# Allegro board expansionboard.brd
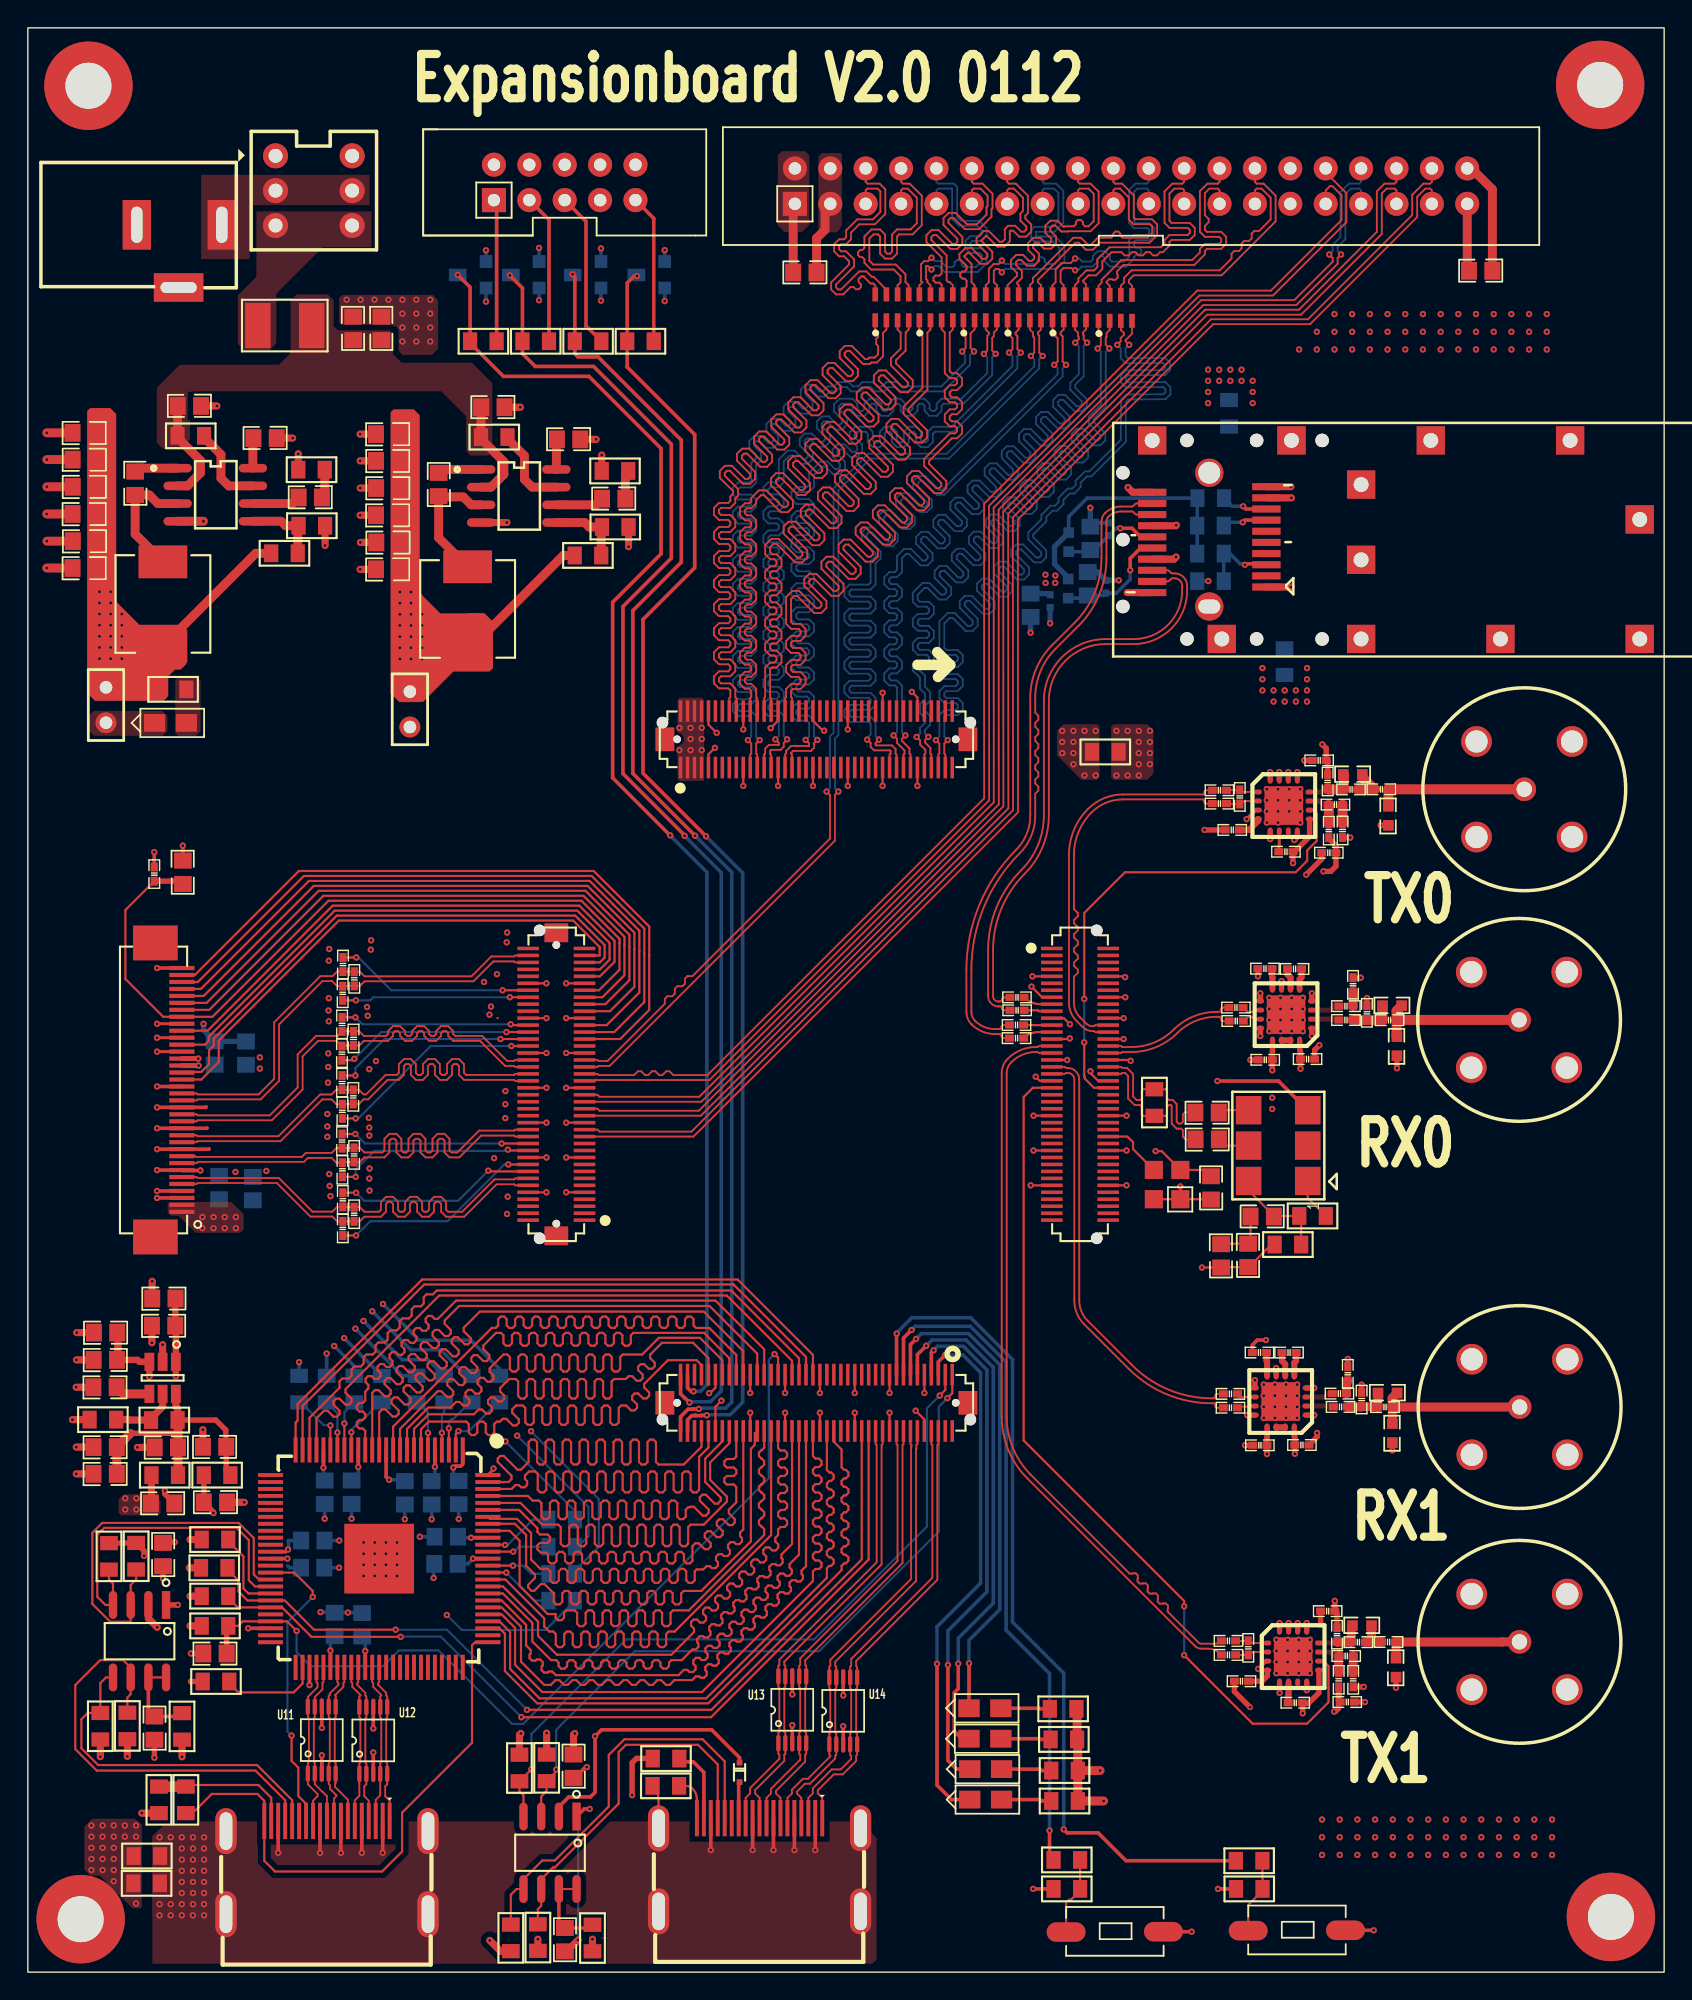
[diagram p0: board, top side]
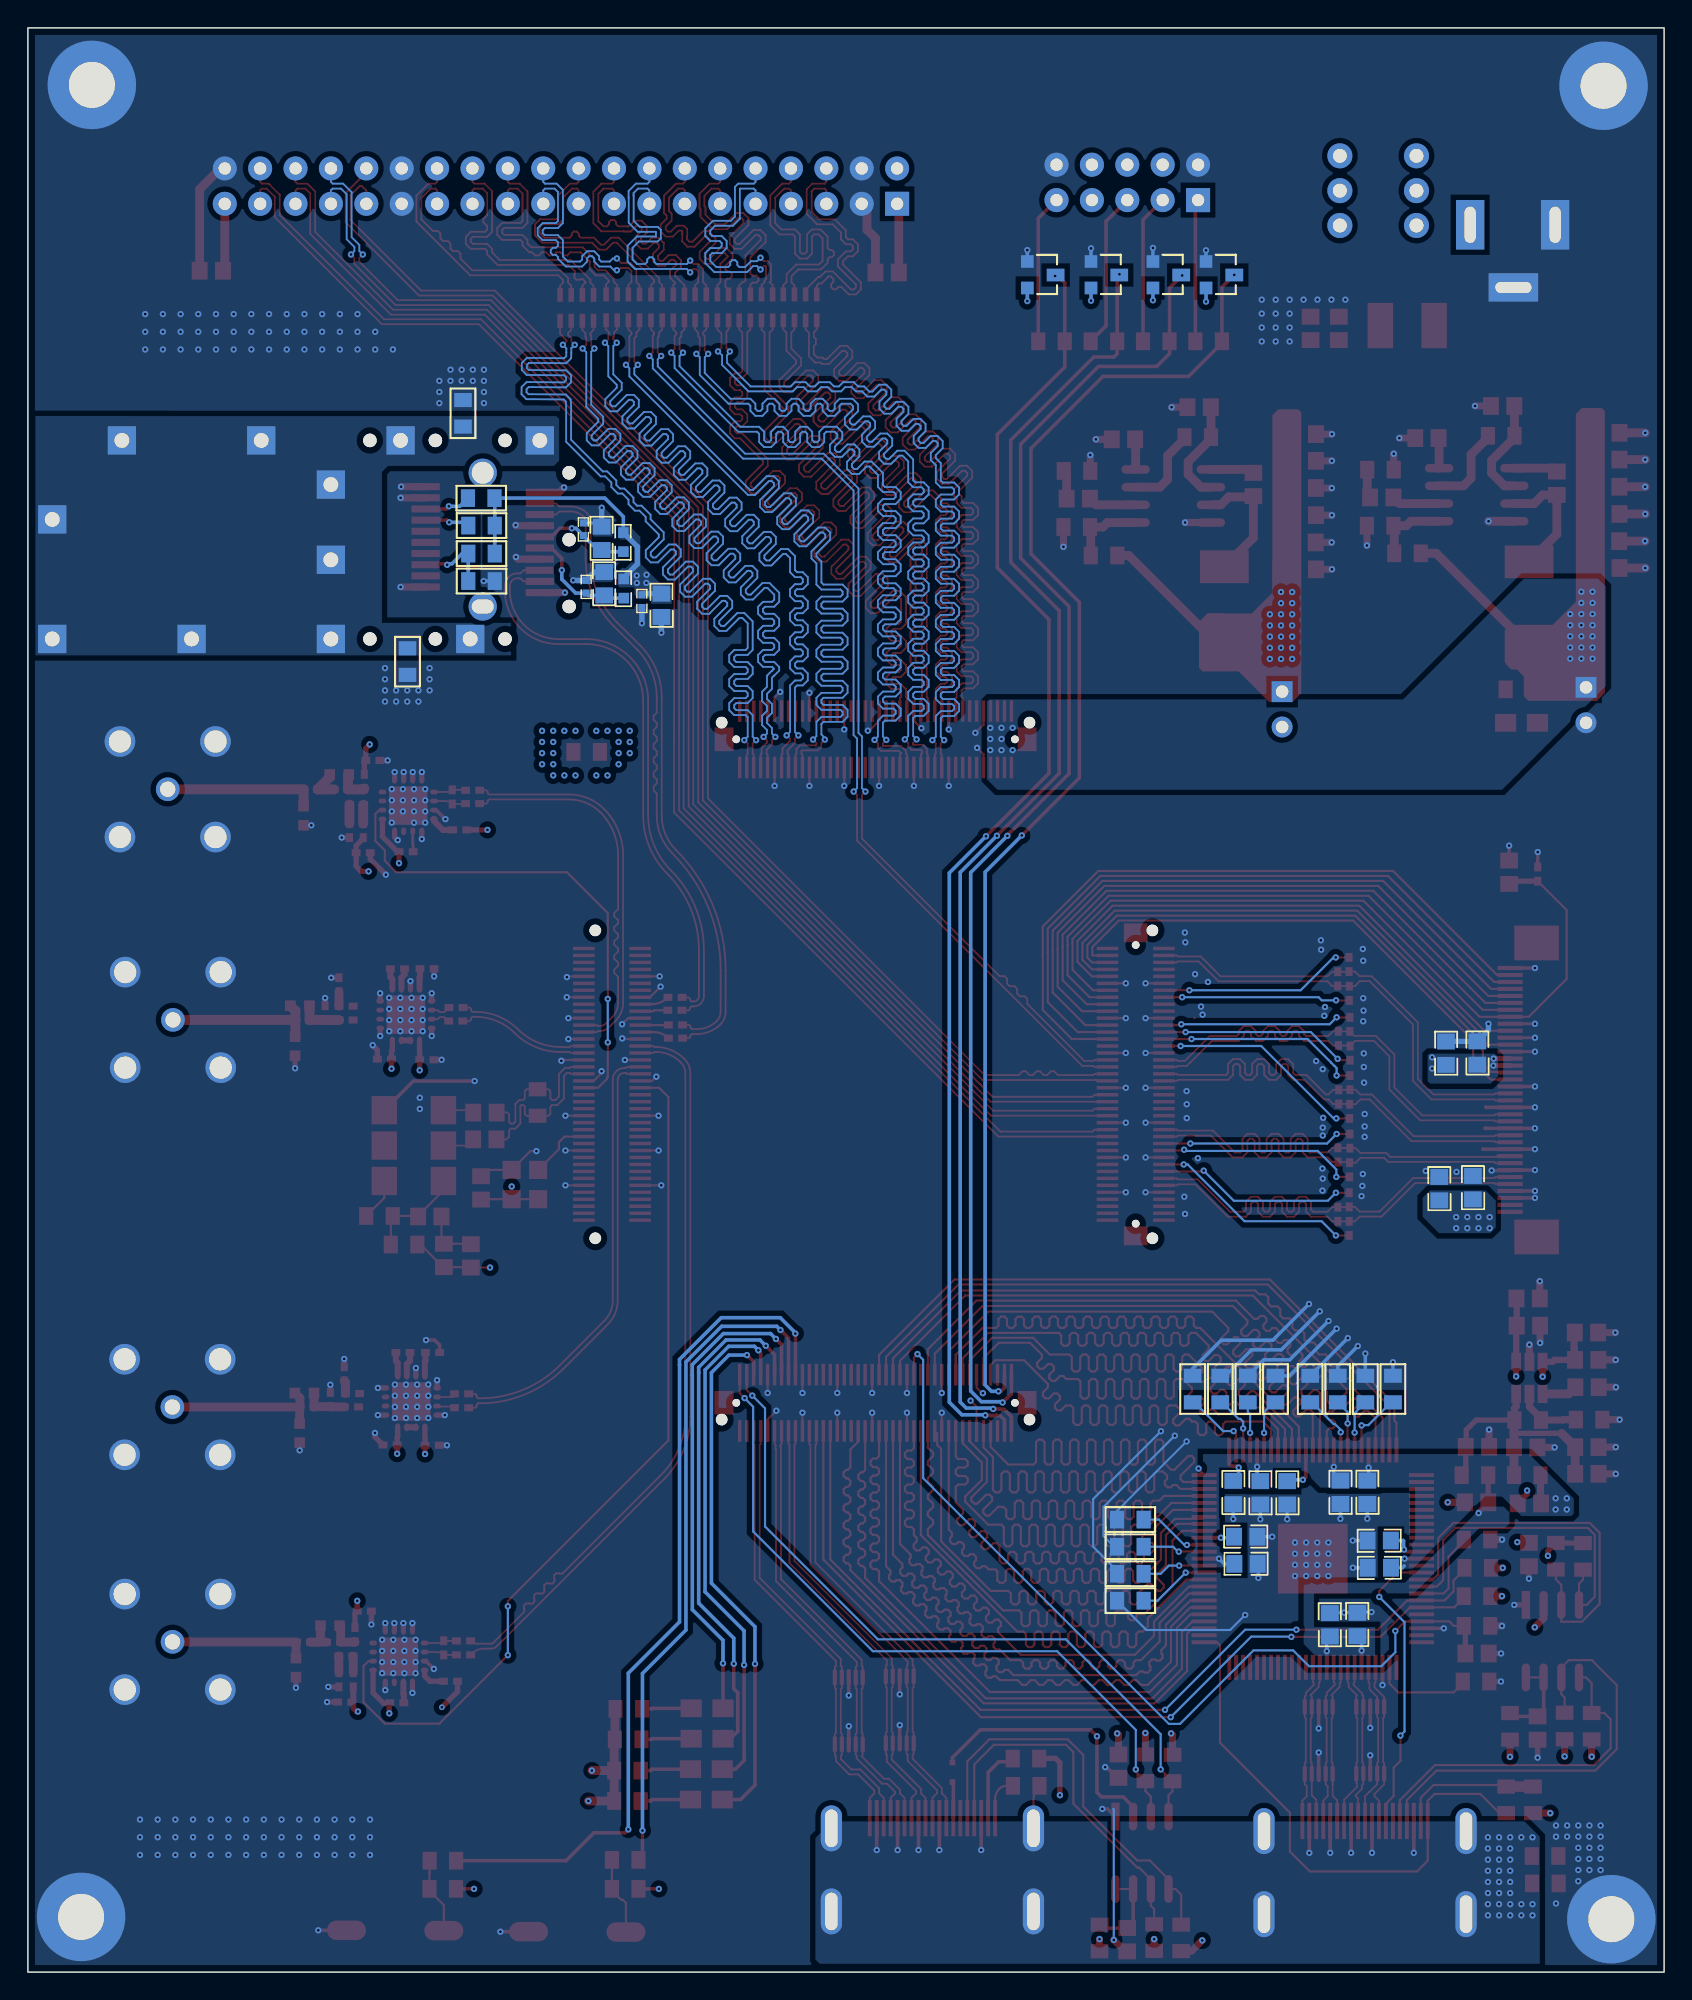
[diagram p1: board, bottom side, seen from below]

Outline 117.45 x 139.55 mm; copper layers: TOP, GND02, PWR03, BOTTOM. Coordinates in mm from the lower left corner of the outline.
Outline path: rectangle 0,0 117.45,139.55

## Design rules (mm)
net group DIFFPAIR36: nets B34_L24_N B34_L24_P
net group MG_HDMI: nets HDMI_CLKN HDMI_CLKP HDMI_D0N HDMI_D0P HDMI_D1N HDMI_D1P HDMI_D2N HDMI_D2P
net group MG_IO2: nets IO_6N IO_6P IO_7N IO_7P IO_8N IO_8P IO_9N IO_9P IO_10N IO_10P IO_11N IO_11P IO_13N IO_13P IO_14N IO_14P IO_15N IO_15P IO_16N IO_16P IO_17N IO_17P
net group MG_MGT_IO: nets MGT_RX2_N MGT_RX2_P MGT_TX2_N MGT_TX2_P
net group MG_SII9136_IN: nets SII9136_B0 SII9136_B1 SII9136_B2 SII9136_B3 SII9136_B4 SII9136_B5 SII9136_B6 SII9136_B7 SII9136_CLK SII9136_G0 SII9136_G1 SII9136_G2 SII9136_G3 SII9136_G4 SII9136_G5 SII9136_G6 SII9136_G7 SII9136_HSYNC SII9136_R0 SII9136_R1 SII9136_R2 SII9136_R3 SII9136_R4 SII9136_R5 SII9136_R6 SII9136_R7 SII9136_SYNC

## Placement (name value [footprint] x y rotation side)
C1  0.1uf  [C0805]  88.6 54.23 0 top
C2  0.1uf  [C0805]  85.65 51.41 90 top
C3  4.7uf  [C0805]  87.59 51.44 90 top
C4  0.1uf  [C0805]  84.65 59.77 180 top
C5  0.1uf  [C0805]  84.64 61.69 180 top
C9  1uf  [R0402]  90.92 72 180 top
C10  0.1uf  [R0402]  88.82 65.48 180 top
C11  0.1uf  [R0402]  91.86 65.53 0 top
C12  4.7uf  [R0402]  86.72 69.23 180 top
C13  4.7uf  [R0402]  86.74 68.27 180 top
C14  10nf  [R0402]  88.8 72.02 180 top
C15  4.7uf  [R0402]  94.61 68.34 180 top
C16  4.7uf  [R0402]  94.61 69.33 180 top
C17  0.1uf  [R0402]  92.69 86.97 180 top
C18  4.7uf  [R0402]  93.86 83.8 180 top
C19  4.7uf  [R0402]  97.15 84.9 180 top
C20  4.7uf  [R0402]  85.53 83.87 180 top
C21  4.7uf  [R0402]  85.53 84.83 180 top
C22  0.1uf  [R0402]  93.38 80.35 180 top
C23  1uf  [R0402]  90.53 44.47 180 top
C24  0.1uf  [R0402]  91.45 37.84 0 top
C25  0.1uf  [R0402]  88.43 37.82 180 top
C26  4.7uf  [R0402]  86.32 41.5 180 top
C27  4.7uf  [R0402]  86.32 40.51 180 top
C28  10nf  [R0402]  88.4 44.47 180 top
C29  4.7uf  [R0402]  94.22 40.57 180 top
C30  4.7uf  [R0402]  94.14 41.52 180 top
C31  0.1uf  [R0402]  93.3 25.91 180 top
C32  4.7uf  [R0402]  94.63 22.69 180 top
C33  4.7uf  [R0402]  97.67 23.69 180 top
C34  4.7uf  [R0402]  86.18 22.77 180 top
C35  4.7uf  [R0402]  86.18 23.77 180 top
C36  0.1uf  [R0402]  94.71 19.39 0 top
C37  10uf  [C0805]  9.74 46.4 180 top
C38  100nf  [C0805]  9.76 48.35 180 top
C39  22nf  [C0805]  5.54 41.98 180 top
C40  10uf  [C0805]  5.55 37.68 180 top
C41  100nf  [C0805]  5.55 35.76 180 top
C42  0.1uf  [C0805]  9.7 29.97 270 top
C43  0.1uf  [C0805]  9.08 17.52 270 top
C44  1nf  [C0805]  13.43 22.87 180 top
C45  10uf  [C0805]  9.94 37.66 180 top
C46  0.1uf  [C0805]  9.67 33.64 0 top
C47  0.1uf  [C0805]  20.44 29.03 0 bottom
C48  0.1uf  [C0805]  30.01 29.3 180 bottom
C49  0.1uf  [C0805]  28.99 34.4 270 bottom
C50  0.1uf  [C0805]  23.24 34.44 270 bottom
C51  0.1uf  [C0805]  21.31 34.44 270 bottom
C52  10uf  [C0805]  13.4 37.7 180 top
C53  0.1uf  [C0805]  13.46 33.72 0 top
C54  0.1uf  [C0805]  22.02 24.95 90 bottom
C55  0.1uf  [C0805]  23.99 24.93 90 bottom
C56  10uf  [C0805]  5.58 45.9 180 top
C57  0.1uf  [C0805]  5.56 43.94 180 top
C58  0.1uf  [C0805]  30.03 31.25 180 bottom
C59  0.1uf  [C0805]  27.06 34.4 270 bottom
C60  0.1uf  [C0805]  30.93 34.42 270 bottom
C61  0.1uf  [C0805]  20.45 30.98 0 bottom
C62  100nf/10V  [C0805]  13.73 56.31 270 bottom
C63  47uf/10V  [C0805]  16.14 56.24 270 bottom
C64  22uf/10V  [C0805]  15.66 65.96 270 bottom
C65  100nf/10V  [C0805]  13.41 65.97 270 bottom
C66  22pf  [C0805]  11.13 78.94 90 top
C67  10uf  [C0805]  11.59 112.41 0 top
C68  0.01uf  [C0805]  7.7 106.86 270 top
C69  0.1uf  [C0805]  17.03 110.1 0 top
C70  33nf  [C0805]  20.27 105.85 0 top
C71  10uf  [C0805]  4.05 108.56 180 top
C72  10uf  [C0805]  4.05 106.61 180 top
C73  0.1uf  [C0805]  4.04 110.48 180 top
C74  0.1uf  [C0805]  4.06 102.71 180 top
C75  0.1uf  [C0805]  4.04 100.78 180 top
C76  0.1uf  [C0805]  4.04 104.66 180 top
C77  10uf  [C0805]  33.38 112.32 0 top
C78  0.01uf  [C0805]  29.48 106.77 270 top
C79  0.1uf  [C0805]  38.81 110.01 0 top
C80  33nf  [C0805]  42.05 105.76 0 top
C81  10uf  [C0805]  25.83 108.47 180 top
C82  10uf  [C0805]  25.84 106.52 180 top
C83  0.1uf  [C0805]  25.83 104.57 180 top
C84  0.1uf  [C0805]  25.85 102.62 180 top
C85  0.1uf  [C0805]  25.83 100.69 180 top
C86  0.1uf  [C0805]  25.83 110.39 180 top
C87  10uf  [C0805]  25.38 117.98 90 top
C88  0.1uf  [C0805]  23.35 117.98 90 top
C89  0.1uf  [C0805]  104.28 122.11 0 top
C90  0.1uf  [C0805]  55.77 121.99 0 top
C91  0.1uf  [C0805]  39.17 14.78 270 top
C92  0.1uf  [C0805]  38.55 2.33 270 top
C93  0.1uf  [C0805]  84.92 56.29 270 top
C94  0.1uF  [C0402]  77.38 99.44 90 bottom
C95  10uf  [C0805]  76.08 99.65 90 bottom
C96  0.1uF  [C0402]  77.58 103.56 90 bottom
C97  10uf  [C0805]  76.26 102.91 90 bottom
C98  0.1uF  [C0402]  73.38 98.4 270 bottom
C99  22uF  [C0805]  71.97 98.1 270 bottom
C100  0.1uf  [R0402]  71 69.96 0 top
C101  0.1uf  [R0402]  71.01 69.04 0 top
C102  0.1uf  [R0402]  70.97 67.98 0 top
C103  0.1uf  [R0402]  70.97 67.04 0 top
CN5  Camera  [FPC36-0R5-23R6X5R75]  11.05 63.32 90 top
CON1  CON40X2_0  [1000K-F80E-01L-A]  56.6 88.48 0 top
CON2  CON40X2_0  [1000K-F80E-01L-A]  37.93 63.72 90 top
CON3  CON40X2_0  [1000K-F80E-01L-A]  56.6 40.86 180 top
CON4  CON40X2_0  [1000K-F80E-01L-A-TEMP]  75.52 63.72 270 top
D1  PGB1010603  [D0603]  98.27 66.46 270 top
D2  PGB1010603  [D0603]  97.66 83 270 top
D3  PGB1010603  [D0603]  97.94 38.69 270 top
D4  PGB1010603  [D0603]  98.21 21.85 270 top
D5  LED  [LEDSO]  9.09 89.66 0 top
D6  BAT54S  [SOT23]  32.88 122.78 270 bottom
D7  BAT54S  [SOT23]  36.69 122.78 270 bottom
D8  BAT54S  [SOT23]  41.14 122.78 270 bottom
D9  BAT54S  [SOT23]  45.71 122.78 270 bottom
D10  LED  [LEDSO]  67.55 18.94 0 top
D11  LED  [LEDSO]  67.55 16.75 0 top
D12  LED  [LEDSO]  67.6 14.57 0 top
D13  LED  [LEDSO]  67.6 12.39 0 top
D14  -  [BAS16XV2T1G]  51.08 14.34 270 top
F1  FUSE  [FUSE_1812]  18.44 118.18 180 top
G1  OSC_7050  [OSC6-5X7]  91.87 56.78 90 top
HOLE1  HOLE  [FPAD_1]  113.63 3.96 0 top
HOLE2  HOLE  [FPAD_1]  4.35 135.39 0 top
HOLE3  HOLE  [FPAD_1]  112.86 135.45 0 top
HOLE4  HOLE  [FPAD_1]  3.79 3.8 0 top
J1  BNC  [SDI5]  107.04 68.35 90 top
J2  BNC  [SDI5]  107.41 84.9 180 top
J3  BNC  [SDI5]  107.08 40.56 90 top
J4  BNC  [SDI5]  107.07 23.71 180 top
J5  WBC1X19S4M2  [MINI_HDMI]  25.97 10.85 0 top
J6  FPGABoardInterface  [IDC-40J]  79.19 128.19 0 top
J7  HEADER 5X2  [JTAG-10]  33.45 127.19 0 top
J8  CON2  [HDR1X2]  5.61 92.21 270 top
J9  CON2  [HDR1X2]  27.42 91.91 270 top
J10  WBC1X19S4M2  [MINI_HDMI]  57.02 11.05 0 top
J11  SFP & CONN  [SD-74737-0033]  88.9 99.42 180 top
L1  5.6nH  [L0603]  97.92 69.36 180 top
L2  5.6nH  [L0603]  95.1 85.96 180 top
L3  5.6nH  [L0603]  97.6 41.56 180 top
L4  5.6nH  [L0603]  95.76 24.87 180 top
L5  INDUCTOR  [R0805]  8.54 8.33 180 top
L6  600Ohm_100Mhz  [R0805]  9.82 35.67 180 top
L7  600Ohm_100Mhz  [R0805]  13.58 35.67 180 top
L8  10uh  [SMTDR75-100M]  9.69 98.2 270 top
L9  10uh  [SMTDR75-100M]  31.57 97.84 270 top
L10  600Ohm 100Mhz  [R0805]  90.44 52.22 180 top
L11  INDUCTOR  [R0805]  8.52 6.37 180 top
L12  MPZ1608 220OHM 100Mhz  [L0603]  74.68 99.3 270 bottom
L13  MPZ1608 220OHM 100Mhz  [L0603]  74.71 102.64 270 bottom
R1  75R  [R0402]  97.74 68.33 180 top
R2  75R  [R0402]  96.11 68.85 90 top
R3  37.4R  [R0402]  95.12 70.87 90 top
R4  75R  [R0402]  93.3 85.46 270 top
R5  75R  [R0402]  93.38 81.93 90 top
R6  10k  [R0402]  90.3 80.42 180 top
R7  750R  [R0402]  86.45 81.98 0 top
R8  75R  [R0402]  94.37 81.94 270 top
R9  0R  [R0805]  77.34 87.58 0 top
R10  75R  [R0402]  94.98 84.89 180 top
R11  75R  [R0402]  97.41 40.56 180 top
R12  75R  [R0402]  95.74 41.1 90 top
R13  37.4R  [R0402]  94.74 42.95 90 top
R14  75R  [R0402]  93.97 24.22 270 top
R15  75R  [R0402]  94.09 20.98 90 top
R16  10k  [R0402]  90.97 19.33 180 top
R17  750R  [R0402]  87.11 20.88 0 top
R18  75R  [R0402]  95.13 20.98 270 top
R19  75R  [R0402]  95.5 23.68 180 top
R24  4.7K  [R0805]  11.34 12.36 270 top
R25  0  [R0805]  9.41 12.36 270 top
R26  10k  [R0805]  9.79 39.62 180 top
R27  20k  [R0805]  5.38 39.65 180 top
R28  4.7K  [R0805]  7.77 29.85 270 top
R29  4.7K  [R0805]  5.82 29.84 270 top
R30  200k  [R0805]  11.06 17.64 90 top
R31  1.5k  [R0805]  7.14 17.67 90 top
R32  1.5k  [R0805]  5.2 17.65 90 top
R33  4.7K  [R0805]  33.84 41.85 90 bottom
R34  4.7K  [R0805]  31.86 41.85 90 bottom
R35  4.7K  [R0805]  29.88 41.85 90 bottom
R36  4.7K  [R0805]  27.9 41.85 90 bottom
R37  4.7K  [R0805]  25.41 41.85 90 bottom
R38  4.7K  [R0805]  23.43 41.85 90 bottom
R39  4.7K  [R0805]  21.45 41.85 90 bottom
R40  4.7K  [R0805]  19.47 41.85 90 bottom
R41  4.7K  [R0805]  38.31 30.53 180 bottom
R42  4.7K  [R0805]  38.31 32.48 180 bottom
R43  4.7K  [R0805]  38.31 28.59 180 bottom
R44  4.7K  [R0805]  38.31 26.66 180 bottom
R45  4.02k  [R0805]  13.5 20.86 180 top
R46  4.7K  [R0805]  13.43 31.05 180 top
R47  4.7K  [R0805]  13.43 24.85 180 top
R48  4.7K  [R0805]  13.38 29.02 0 top
R49  4.7K  [R0805]  13.43 26.98 0 top
R50  100R  [R0402]  22.61 53.38 270 top
R51  150R  [R0402]  23.42 54.4 270 top
R52  100R  [R0402]  22.61 55.43 90 top
R53  100R  [R0402]  22.58 57.59 270 top
R54  150R  [R0402]  23.42 58.65 90 top
R55  100R  [R0402]  22.56 59.65 90 top
R56  10k  [R0402]  9.07 78.81 90 top
R57  100R  [R0402]  22.58 61.78 270 top
R58  150R  [R0402]  23.36 62.82 90 top
R59  100R  [R0402]  22.56 63.85 90 top
R60  100R  [R0402]  22.55 65.96 270 top
R61  150R  [R0402]  23.38 67.02 90 top
R62  100R  [R0402]  22.56 68.02 90 top
R63  100R  [R0402]  22.6 70.26 270 top
R64  150R  [R0402]  23.43 71.29 90 top
R65  100R  [R0402]  22.62 72.32 90 top
R66  47k  [R0805]  11.69 110.27 0 top
R67  2.2k  [R0805]  20.36 107.84 0 top
R68  10k/1%  [R0805]  20.38 103.81 0 top
R69  44.2k/1%  [R0805]  18.42 101.83 180 top
R70  47k  [R0805]  33.48 110.18 0 top
R71  2.2k  [R0805]  42.14 107.75 0 top
R72  10k/1%  [R0805]  42.16 103.72 0 top
R73  26.1k/1%  [R0805]  40.2 101.68 180 top
R74  5k  [R0805]  10.42 92.07 0 top
R75  33R  [R0805]  32.69 117.05 0 top
R76  33R  [R0805]  36.45 117.05 0 top
R77  33R  [R0805]  40.21 117.05 0 top
R78  33R  [R0805]  43.97 117.05 0 top
R79  1k  [R0805]  74.31 18.9 180 top
R80  1k  [R0805]  74.36 16.7 180 top
R81  1k  [R0805]  74.41 14.47 180 top
R82  1k  [R0805]  74.41 12.28 180 top
R83  1k  [R0805]  74.57 8.06 0 top
R84  10k  [R0805]  74.57 5.97 0 top
R85  1k  [R0805]  87.66 8 0 top
R86  10k  [R0805]  87.67 5.97 0 top
R87  100R/NC  [R0402]  87.6 23.28 90 top
R88  100R/NC  [R0402]  86.99 84.35 90 top
R89  4.7K  [R0805]  92.21 54.27 180 top
R90  100R  [R0805]  80.86 62.41 90 top
R91  4.7K  [R0805]  45.79 13.37 180 top
R92  0  [R0805]  45.81 15.33 180 top
R93  4.7K  [R0805]  37.24 14.66 270 top
R94  4.7K  [R0805]  35.29 14.65 270 top
R95  200k  [R0805]  40.53 2.45 90 top
R96  1.5k  [R0805]  36.61 2.48 90 top
R97  1.5k  [R0805]  34.67 2.46 90 top
R98  0R  [R0805]  86.22 111.88 270 bottom
R99  0R  [R0805]  90.2 94.06 270 bottom
R100  4.7K  [R0805]  84.89 101.81 180 bottom
R101  4.7K  [R0805]  84.91 105.8 180 bottom
R102  NC  [R0805]  84.89 99.84 0 bottom
R103  4.7K  [R0805]  84.89 103.83 0 bottom
RN1  RESARR_IS_4/SM  [RN-8P]  60.83 118.56 90 top
RN2  RESARR_IS_4/SM  [RN-8P]  63.99 118.56 90 top
RN3  RESARR_IS_4/SM  [RN-8P]  67.16 118.56 90 top
RN4  RESARR_IS_4/SM  [RN-8P]  70.32 118.56 90 top
RN5  RESARR_IS_4/SM  [RN-8P]  73.55 118.56 90 top
RN6  RESARR_IS_4/SM  [RN-8P]  76.85 118.52 90 top
SW2  Button  [KEY735SO]  74.52 2.88 0 top
SW3  Button  [KEY735SO]  87.59 2.98 0 top
SW4  Switch  [POWER_SW]  23.28 127.86 0 top
U1  GV8601A  [QFP16-0R65-4X4]  90.31 68.72 90 top
U2  GV8500  [QFP16-0R65-4X4]  90.15 83.73 270 top
U3  GV8601A  [QFP16-0R65-4X4]  89.93 40.95 90 top
U4  GV8500  [QFP16-0R65-4X4]  90.82 22.65 270 top
U5  RT9065  [SOT23-6]  9.67 42.65 180 top
U6  GTL2002D  [SO8-1R27-4]  8.02 23.75 180 top
U7  SII9136_3  [TQFP100-0R5-16X16]  25.22 29.68 270 top
U8  MP1482DS  [MP1482-SOIC8]  13.45 106.04 270 top
U9  MP1482DS  [MP1482-SOIC8]  35.23 105.95 270 top
U10  DCJACK  [CN1-DCJACK]  7.82 125.42 270 top
U11  AZ1045-04F  [MSOP10]  20.1 14.25 90 top
U12  AZ1045-04F  [MSOP10]  23.79 14.23 90 top
U13  AZ1045-04F  [MSOP10]  53.87 16.43 90 top
U14  AZ1045-04F  [MSOP10]  57.53 16.35 90 top
U15  GTL2002D  [SO8-1R27-4]  37.48 8.56 180 top
Y1  27Mhz  [OSC3_2X2_5]  82.72 55.48 180 top

## Library data of the parts
C1-C5 C9-C103 = CAP
CN5 = Camera
CON1-CON4 = CON40X2_0
D1-D4 = ESD_0
D5 D10-D13 = LED
D6-D9 = BAT54S
D14 = BAS16XV2T1G
F1 = FUSE
G1 = SiT9102
HOLE1-HOLE4 = HOLE
J1-J4 = SDIInterface
J5 J10 = HDMI
J6 = FPGABoardInterface
J7 = HEADER 5X2
J8 J9 = CON2
J11 = SFP_AND_CONN
L1-L11 = INDUCTOR
L12 L13 = MPZ1608 220OHM 100Mhz
R1-R19 R24-R103 = RESISTOR
RN1-RN6 = RESARR_IS_4/SM
SW2 SW3 = Button
SW4 = Switch_0
U1 U3 = GV8601A_0
U2 U4 = GV8500_0
U5 = RT9065
U6 U15 = GTL2002D
U7 = SII9136_3
U8 U9 = MP1482DS
U10 = DCJACK
U11-U14 = RCLAMP0504M
Y1 = 27Mhz

## Footprints (pads in the part's own frame, mm; a bottom-side part is the same pattern mirrored in y, then rotated)
1000K-F80E-01L-A
  round 0.8 hole 0.8 unplated: (-11.049,1.206) (11.049,1.206)
  round 0.551 hole 0.551 unplated: (-10,0) (10,0)
  rect 0.249x1.549 smd: 1(-9.751,-2.024) 2(-9.751,2.024) 3(-9.251,-2.024) 4(-9.251,2.024) 5(-8.75,-2.024) 6(-8.75,2.024) 7(-8.25,-2.024) 8(-8.25,2.024) 9(-7.75,-2.024) 10(-7.75,2.024) 11(-7.249,-2.024) 12(-7.249,2.024) 13(-6.751,-2.024) 14(-6.751,2.024) 15(-6.251,-2.024) 16(-6.251,2.024) 17(-5.751,-2.024) 18(-5.751,2.024) 19(-5.25,-2.024) 20(-5.25,2.024) 21(-4.75,-2.024) 22(-4.75,2.024) 23(-4.249,-2.024) 24(-4.249,2.024) 25(-3.749,-2.024) 26(-3.749,2.024) 27(-3.251,-2.024) 28(-3.251,2.024) 29(-2.751,-2.024) 30(-2.751,2.024) 31(-2.25,-2.024) 32(-2.25,2.024) 33(-1.75,-2.024) 34(-1.75,2.024) 35(-1.25,-2.024) 36(-1.25,2.024) 37(-0.749,-2.024) 38(-0.749,2.024) 39(-0.249,-2.024) 40(-0.249,2.024) 41(0.249,-2.024) 42(0.249,2.024) 43(0.749,-2.024) 44(0.749,2.024) 45(1.25,-2.024) 46(1.25,2.024) 47(1.75,-2.024) 48(1.75,2.024) 49(2.25,-2.024) 50(2.25,2.024) 51(2.751,-2.024) 52(2.751,2.024) 53(3.251,-2.024) 54(3.251,2.024) 55(3.749,-2.024) 56(3.749,2.024) 57(4.249,-2.024) 58(4.249,2.024) 59(4.75,-2.024) 60(4.75,2.024) 61(5.25,-2.024) 62(5.25,2.024) 63(5.751,-2.024) 64(5.751,2.024) 65(6.251,-2.024) 66(6.251,2.024) 67(6.751,-2.024) 68(6.751,2.024) 69(7.249,-2.024) 70(7.249,2.024) 71(7.75,-2.024) 72(7.75,2.024) 73(8.25,-2.024) 74(8.25,2.024) 75(8.75,-2.024) 76(8.75,2.024) 77(9.251,-2.024) 78(9.251,2.024) 79(9.751,-2.024) 80(9.751,2.024)
  rect 1.351x1.699 smd: 81(-10.876,0) 84(10.876,0)
1000K-F80E-01L-A-TEMP
  round 0.8 hole 0.8 unplated: (-11.049,1.206) (11.049,1.206)
  rect 0.249x1.549 smd: 1(-9.751,-2.024) 2(-9.751,2.024) 3(-9.251,-2.024) 4(-9.251,2.024) 5(-8.75,-2.024) 6(-8.75,2.024) 7(-8.25,-2.024) 8(-8.25,2.024) 9(-7.75,-2.024) 10(-7.75,2.024) 11(-7.249,-2.024) 12(-7.249,2.024) 13(-6.751,-2.024) 14(-6.751,2.024) 15(-6.251,-2.024) 16(-6.251,2.024) 17(-5.751,-2.024) 18(-5.751,2.024) 19(-5.25,-2.024) 20(-5.25,2.024) 21(-4.75,-2.024) 22(-4.75,2.024) 23(-4.249,-2.024) 24(-4.249,2.024) 25(-3.749,-2.024) 26(-3.749,2.024) 27(-3.251,-2.024) 28(-3.251,2.024) 29(-2.751,-2.024) 30(-2.751,2.024) 31(-2.25,-2.024) 32(-2.25,2.024) 33(-1.75,-2.024) 34(-1.75,2.024) 35(-1.25,-2.024) 36(-1.25,2.024) 37(-0.749,-2.024) 38(-0.749,2.024) 39(-0.249,-2.024) 40(-0.249,2.024) 41(0.249,-2.024) 42(0.249,2.024) 43(0.749,-2.024) 44(0.749,2.024) 45(1.25,-2.024) 46(1.25,2.024) 47(1.75,-2.024) 48(1.75,2.024) 49(2.25,-2.024) 50(2.25,2.024) 51(2.751,-2.024) 52(2.751,2.024) 53(3.251,-2.024) 54(3.251,2.024) 55(3.749,-2.024) 56(3.749,2.024) 57(4.249,-2.024) 58(4.249,2.024) 59(4.75,-2.024) 60(4.75,2.024) 61(5.25,-2.024) 62(5.25,2.024) 63(5.751,-2.024) 64(5.751,2.024) 65(6.251,-2.024) 66(6.251,2.024) 67(6.751,-2.024) 68(6.751,2.024) 69(7.249,-2.024) 70(7.249,2.024) 71(7.75,-2.024) 72(7.75,2.024) 73(8.25,-2.024) 74(8.25,2.024) 75(8.75,-2.024) 76(8.75,2.024) 77(9.251,-2.024) 78(9.251,2.024) 79(9.751,-2.024) 80(9.751,2.024)
BAS16XV2T1G
  rect 0.406x0.406 smd: 1(-0.701,0) 2(0.701,0)
C0402
  rect 0.508x0.508 smd: 1(-0.457,0) 2(0.457,0)
C0805
  rect 1.143x1.27 smd: 1(-0.838,0) 2(0.838,0)
CN1-DCJACK
  rect 3.556x2.032 hole 2.601x0.8: 1(0,0) 3(0,6.101)
  rect 2.032x3.556 hole 0.8x2.601: 2(4.501,2.997)
D0603
  rect 0.762x0.762 smd: 1(-0.686,0) 2(0.686,0)
FPAD_1
  round 6.35 hole 3.302: 1(0,0)
FPC36-0R5-23R6X5R75
  rect 2.499x3.2 smd: (-10.551,1.9) (10.551,1.9)
  rect 0.3x1.801 smd: 1(-8.75,0) 2(-8.25,0) 3(-7.75,0) 4(-7.249,0) 5(-6.749,0) 6(-6.251,0) 7(-5.751,0) 8(-5.25,0) 9(-4.75,0) 10(-4.249,0) 11(-3.749,0) 12(-3.251,0) 13(-2.751,0) 14(-2.25,0) 15(-1.75,0) 16(-1.25,0) 17(-0.749,0) 18(-0.249,0) 19(0.249,0) 20(0.749,0) 21(1.25,0) 22(1.75,0) 23(2.25,0) 24(2.751,0) 25(3.251,0) 26(3.749,0) 27(4.249,0) 28(4.75,0) 29(5.25,0) 30(5.751,0) 31(6.251,0) 32(6.749,0) 33(7.249,0) 34(7.75,0) 35(8.25,0) 36(8.75,0)
FUSE_1812
  rect 1.829x3.251 smd: 1(-1.93,0) 2(1.93,0)
HDR1X2
  rect 1.501x1.501 hole 0.899: 1(0,0)
  round 1.501 hole 0.899: 2(2.54,0)
IDC-40J
  rect 1.727x1.727 hole 0.889: 1(-24.13,-1.27)
  round 1.727 hole 0.889: 2(-24.13,1.27) 3(-21.59,-1.27) 4(-21.59,1.27) 5(-19.05,-1.27) 6(-19.05,1.27) 7(-16.51,-1.27) 8(-16.51,1.27) 9(-13.97,-1.27) 10(-13.97,1.27) 11(-11.43,-1.27) 12(-11.43,1.27) 13(-8.89,-1.27) 14(-8.89,1.27) 15(-6.35,-1.27) 16(-6.35,1.27) 17(-3.81,-1.27) 18(-3.81,1.27) 19(-1.27,-1.27) 20(-1.27,1.27) 21(1.27,-1.27) 22(1.27,1.27) 23(3.81,-1.27) 24(3.81,1.27) 25(6.35,-1.27) 26(6.35,1.27) 27(8.89,-1.27) 28(8.89,1.27) 29(11.43,-1.27) 30(11.43,1.27) 31(13.97,-1.27) 32(13.97,1.27) 33(16.51,-1.27) 34(16.51,1.27) 35(19.05,-1.27) 36(19.05,1.27) 37(21.59,-1.27) 38(21.59,1.27) 39(24.13,-1.27) 40(24.13,1.27)
JTAG-10
  rect 1.73x1.73 hole 0.889: 1(0,0)
  round 1.73 hole 0.889: 2(0,2.54) 3(2.54,0) 4(2.54,2.54) 5(5.08,0) 6(5.08,2.54) 7(7.62,0) 8(7.62,2.54) 9(10.16,0) 10(10.16,2.54)
KEY735SO
  oval 2.794x1.4 smd: 1(0,0) 2(6.985,0.025)
L0603
  rect 0.762x0.762 smd: 1(-0.686,0) 2(0.686,0)
LEDSO
  rect 1.524x1.27 smd: 1(2.286,0) 2(0,0)
MINI_HDMI
  rect 0.279x2.601 smd: 1(0,0) 2(-0.5,0) 3(-1.001,0) 4(-1.501,0) 5(-1.999,0) 6(-2.499,0) 7(-3,0) 8(-3.5,0) 9(-4,0) 10(-4.501,0) 11(-4.999,0) 12(-5.499,0) 13(-5.999,0) 14(-6.5,0) 15(-7,0) 16(-7.501,0) 17(-8.001,0) 18(-8.499,0) 19(-8.999,0)
  oval 1.524x3.299 hole 0.899x2.7: 20(-11.75,-0.729) 21(-11.75,-6.69) 22(2.751,-6.69) 23(2.751,-0.729)
MP1482-SOIC8
  oval 0.61x2.032 smd: 1(-1.905,-2.7) 2(-0.635,-2.7) 3(0.635,-2.7) 4(1.905,-2.7) 5(1.905,2.7) 6(0.635,2.7) 7(-0.635,2.7) 8(-1.905,2.7)
MSOP10
  oval 1.194x0.305 smd: 1(0,0) 2(0,-0.5) 3(0,-1.001) 4(0,-1.499) 5(0,-1.999) 6(4.801,-1.999) 7(4.801,-1.499) 8(4.801,-1.001) 9(4.801,-0.5) 10(4.801,0)
OSC3_2X2_5
  rect 1.3x1.3 smd: 1(0,0) 2(0,-2.101) 3(1.9,-2.101) 4(1.9,0)
OSC6-5X7
  rect 2.032x1.829 smd: 1(0,0) 2(2.54,0) 3(5.08,0) 4(5.08,4.242) 5(2.54,4.242) 6(0,4.242)
POWER_SW
  round 1.801 hole 1.001: 1(-5.499,2.499) 2(-5.499,0) 3(-5.499,-2.499) 4(0,2.499) 5(0,0) 6(0,-2.499)
QFP16-0R65-4X4
  oval 0.351x0.551 smd: 1(-0.975,-1.849) 2(-0.325,-1.849) 3(0.325,-1.849) 4(0.975,-1.849) 9(0.975,1.849) 10(0.325,1.849) 11(-0.325,1.849) 12(-0.975,1.849)
  oval 0.551x0.351 smd: 5(1.849,-0.975) 6(1.849,-0.325) 7(1.849,0.325) 8(1.849,0.975) 13(-1.849,0.975) 14(-1.849,0.325) 15(-1.849,-0.325) 16(-1.849,-0.975)
  rect 2.761x2.761 smd: 17(0,0)
R0402
  rect 0.635x0.508 smd: 1(-0.508,0) 2(0.508,0)
R0805
  rect 1.016x1.27 smd: 1(-0.953,0) 2(0.953,0)
RN-8P
  rect 1.001x0.401 smd: 1(0,0) 2(0,-0.8) 3(0,-1.6) 4(0,-2.4) 5(1.859,-2.4) 6(1.859,-1.6) 7(1.859,-0.8) 8(1.859,0)
SD-74737-0033
  round 0.965 hole 0.965 unplated: (-4,3.729) (-4,-10.521) (0.701,3.729) (0.701,-10.521) (5.7,3.729) (5.7,-10.521) (10.3,1.4) (10.3,-3.401) (10.3,-8.199)
  round 2.032 hole 1.575x1.001: (4.1,1.4)
  round 2.032 hole 1.575: (4.1,-8.199)
  rect 2.032x0.508 smd: 1(0,0) 2(0,-0.8) 3(0,-1.6) 4(0,-2.4) 5(0,-3.2) 6(0,-4) 7(0,-4.801) 8(0,-5.601) 9(0,-6.401) 10(0,-7.201) 11(8.199,-6.8) 12(8.199,-5.999) 13(8.199,-5.199) 14(8.199,-4.399) 15(8.199,-3.599) 16(8.199,-2.799) 17(8.199,-1.999) 18(8.199,-1.199) 19(8.199,-0.401) 20(8.199,0.401)
  rect 2.032x2.032 hole 1.067: 21(3.2,3.729) 22(-6.8,3.729) 23(-16.8,3.729) 24(-26.8,3.729) 25(-26.8,-4.849) 26(-21.801,-10.521) 27(-11.801,-10.521) 28(-6.8,-7.351) 29(-6.8,-1.951) 30(-1.801,-10.521) 31(8.199,-10.521)
SDI5
  round 1.699 hole 1.1: 1(0,0)
  round 2.2 hole 1.6: 2(-3.429,3.429) 3(3.429,3.429) 4(3.429,-3.429) 5(-3.429,-3.429)
SMTDR75-100M
  rect 2.349x3.5 smd: 1(-3.025,0) 2(3.025,0)
SO8-1R27-4
  rect 0.599x1.999 smd: 1(-1.905,-2.601)
  oval 0.599x1.999 smd: 2(-0.635,-2.601) 3(0.635,-2.601) 4(1.905,-2.601) 5(1.905,2.601) 6(0.635,2.601) 7(-0.635,2.601) 8(-1.905,2.601)
SOT23
  rect 0.909x0.909 smd: 1(0,0) 2(1.9,0)
  rect 0.909x1.27 smd: 3(0.97,2.029)
SOT23-6
  rect 0.701x1.3 smd: 1(-0.95,-1.151) 2(0,-1.151) 3(0.95,-1.151) 4(0.95,1.151) 5(0,1.151) 6(-0.95,1.151)
TQFP100-0R5-16X16
  rect 1.801x0.279 smd: 1(-7.8,5.999) 2(-7.8,5.499) 3(-7.8,5.001) 4(-7.8,4.501) 5(-7.8,4) 6(-7.8,3.5) 7(-7.8,3) 8(-7.8,2.499) 9(-7.8,1.999) 10(-7.8,1.501) 11(-7.8,1.001) 12(-7.8,0.5) 13(-7.8,0) 14(-7.8,-0.5) 15(-7.8,-1.001) 16(-7.8,-1.501) 17(-7.8,-1.999) 18(-7.8,-2.499) 19(-7.8,-3) 20(-7.8,-3.5) 21(-7.8,-4) 22(-7.8,-4.501) 23(-7.8,-5.001) 24(-7.8,-5.499) 25(-7.8,-5.999) 51(7.8,-5.999) 52(7.8,-5.499) 53(7.8,-5.001) 54(7.8,-4.501) 55(7.8,-4) 56(7.8,-3.5) 57(7.8,-3) 58(7.8,-2.499) 59(7.8,-1.999) 60(7.8,-1.501) 61(7.8,-1.001) 62(7.8,-0.5) 63(7.8,0) 64(7.8,0.5) 65(7.8,1.001) 66(7.8,1.501) 67(7.8,1.999) 68(7.8,2.499) 69(7.8,3) 70(7.8,3.5) 71(7.8,4) 72(7.8,4.501) 73(7.8,5.001) 74(7.8,5.499) 75(7.8,5.999)
  rect 0.279x1.801 smd: 26(-5.999,-7.8) 27(-5.499,-7.8) 28(-5.001,-7.8) 29(-4.501,-7.8) 30(-4,-7.8) 31(-3.5,-7.8) 32(-3,-7.8) 33(-2.499,-7.8) 34(-1.999,-7.8) 35(-1.501,-7.8) 36(-1.001,-7.8) 37(-0.5,-7.8) 38(0,-7.8) 39(0.5,-7.8) 40(1.001,-7.8) 41(1.501,-7.8) 42(1.999,-7.8) 43(2.499,-7.8) 44(3,-7.8) 45(3.5,-7.8) 46(4,-7.8) 47(4.501,-7.8) 48(5.001,-7.8) 49(5.499,-7.8) 50(5.999,-7.8) 76(5.999,7.8) 77(5.499,7.8) 78(5.001,7.8) 79(4.501,7.8) 80(4,7.8) 81(3.5,7.8) 82(3,7.8) 83(2.499,7.8) 84(1.999,7.8) 85(1.501,7.8) 86(1.001,7.8) 87(0.5,7.8) 88(0,7.8) 89(-0.5,7.8) 90(-1.001,7.8) 91(-1.501,7.8) 92(-1.999,7.8) 93(-2.499,7.8) 94(-3,7.8) 95(-3.5,7.8) 96(-4,7.8) 97(-4.501,7.8) 98(-5.001,7.8) 99(-5.499,7.8) 100(-5.999,7.8)
  rect 5.001x5.001 smd: 101(0,0)

## Nets
5V_HDMI: J5.18 R24.1 R25.1
5V_HDMI_FPGA: J10.18 R92.1
+1.2V: C40.1 C41.1 C45.1 C52.1 L6.1 L7.1 R26.1 U5.6(OUT)
+1.2V_A: C53.1 C54.1 C55.1 L7.2 U7.56(AVCC#56) U7.61(AVCC#61)
+3.3V: C37.1 C38.1 C42.1 C56.1 C57.1 C58.1 C59.1 C60.1 C61.1 C62.2 C63.2 C81.1 C82.1 C83.1 C84.1 C85.1 C86.1 C90.1 C91.1 C93.2 C98.1 C99.1 CN5.1 CN5.2 D6.2 D7.2 D8.2 D9.2 D14.1(ANODE) J6.1 J6.2 J7.4 J7.6 J9.1 L9.2 L12.1 L13.1 R9.1 R28.1 R29.1 R48.1 R49.1 R73.2 R79.1 R80.1 R81.1 R82.1 R84.1 R86.1 R93.1 R94.1 R100.2 R101.2 R103.1 U5.1(VIN) U5.3(EN) U6.2(SREF) U7.1(IOVCC33#1) U7.12(IOVCC33#12) U7.37(IOVCC33#37) U7.91(IOVCC33#91) U15.2(SREF) Y1.1(OE) Y1.4(VCC)
+3.3V SDI: C2.1 C3.1 C10.1 C11.1 C17.1 C22.1 C24.1 C25.1 C31.1 C36.1 L10.2 R4.1 R5.1 R6.1 R7.1 R9.2 R14.1 R15.1 R16.1 R17.1 U1.13(VCC#13) U1.16(VCC#16) U2.9(VCC) U3.13(VCC#13) U3.16(VCC#16) U4.9(VCC)
+5.0V: C64.2 C65.2 C71.1 C72.1 C73.1 C74.1 C75.1 C76.1 C89.1 CN5.22 CN5.23 CON1.1 CON1.2 CON1.3 CON1.4 CON1.5 CON1.6 CON1.7 CON1.8 J6.39 J8.1 L8.2 R25.2 R30.1 R31.1 R32.1 R69.2 R74.1 R92.2 R95.1 R96.1 R97.1
+12V: C67.1 C77.1 C87.1 C88.1 F1.1 R66.1 R70.1 U8.2(IN) U9.2(IN)
AGND: J5.2 J5.5 J5.8 J5.11 J5.17 J5.20(S1) J5.21(S2) J5.22(S3) J5.23(S4) J10.2 J10.5 J10.8 J10.11 J10.17 J10.20(S1) J10.21(S2) J10.22(S3) J10.23(S4) L5.1 L11.1 R91.2
GND: C10.2 C11.2 C14.2 C17.2 C22.2 C24.2 C25.2 C28.2 C31.2 C36.2 C37.2 C38.2 C39.2 C40.2 C41.2 C42.2 C43.2 C44.2 C45.2 C46.2 C47.2 C48.2 C49.2 C50.2 C51.2 C52.2 C53.2 C54.2 C55.2 C56.2 C57.2 C58.2 C59.2 C60.2 C61.2 C62.1 C63.1 C64.1 C65.1 C66.2 C67.2 C69.2 C71.2 C72.2 C73.2 C74.2 C75.2 C76.2 C77.2 C79.2 C81.2 C82.2 C83.2 C84.2 C85.2 C86.2 C87.2 C88.2 C89.2 C90.2 C91.2 C92.2 C93.1 C94.2 C95.2 C96.2 C97.2 C98.2 C99.2 CN5.3 CN5.4 CN5.7 CN5.10 CN5.13 CN5.16 CN5.19 CN5.24 CN5.26 CN5.28 CN5.36 CON1.9 CON1.10 CON1.19 CON1.20 CON1.29 CON1.30 CON1.39 CON1.40 CON1.49 CON1.50 CON1.59 CON1.60 CON1.69 CON1.70 CON2.9 CON2.10 CON2.19 CON2.20 CON2.29 CON2.30 CON2.39 CON2.40 CON2.49 CON2.50 CON2.59 CON2.60 CON2.69 CON2.70 CON3.9 CON3.10 CON3.19 CON3.20 CON3.29 CON3.30 CON3.39 CON3.40 CON3.49 CON3.50 CON3.59 CON3.60 CON3.69 CON3.70 CON4.9 CON4.10 CON4.15 CON4.16 CON4.21 CON4.22 CON4.27 CON4.28 CON4.33 CON4.34 CON4.39 CON4.40 CON4.49 CON4.50 CON4.59 CON4.60 CON4.69 CON4.70 D1.2 D2.2 D3.2 D4.2 D5.2(CATHODE) D6.1 D7.1 D8.1 D9.1 G1.3(GND) HOLE1.1 HOLE2.1 HOLE3.1 HOLE4.1 J1.2 J1.3 J1.4 J1.5 J2.2 J2.3 J2.4 J2.5 J3.2 J3.3 J3.4 J3.5 J4.2 J4.3 J4.4 J4.5 J6.3 J6.4 J6.29 J6.30 J6.40 J7.2 J7.10 J8.2 J9.2 J11.1(VEET1) J11.9(VEER1) J11.10(VEER2) J11.11(VEER3) J11.14(VEER4) J11.17(VEET2) J11.20(VEET3) L5.2 L11.2 R2.2 R3.2 R8.2 R12.2 R13.2 R18.2 R27.2 R33.2 R34.2 R35.2 R36.2 R37.2 R38.2 R39.2 R40.2 R41.1 R42.1 R43.1 R44.1 R45.2 R46.2 R47.2 R56.2 R67.1 R68.2 R71.1 R72.2 R98.1 R99.2 R102.1 SW2.2(P2) SW3.2(P2) U1.1(VEE#1) U1.4(VEE#4) U1.7(BYPASS) U1.9(VEE#9) U1.12(VEE#12) U1.17(TAB) U2.3(GND) U2.5(NC1) U2.8(NC2) U2.13(NC3) U2.14(NC4) U2.15(NC5) U2.16(NC6) U2.17(TAB) U3.1(VEE#1) U3.4(VEE#4) U3.7(BYPASS) U3.9(VEE#9) U3.12(VEE#12) U3.17(TAB) U4.3(GND) U4.5(NC1) U4.8(NC2) U4.13(NC3) U4.14(NC4) U4.15(NC5) U4.16(NC6) U4.17(TAB) U5.2(GND) U6.1(GND) U7.48(GND#48) U7.53(GND#53) U7.100(GND#100) U7.101(GND#101) U8.4(GND) U9.4(GND) U10.1(GND#1) U10.2(GND#2) U11.3(GND1) U11.8(GND2) U12.3(GND1) U12.8(GND2) U13.3(GND1) U13.8(GND2) U14.3(GND1) U14.8(GND2) U15.1(GND) Y1.2(GND)
GND_EARTH: J11.21(G1) J11.22(G2) J11.23(G4) J11.24(G3) J11.25(G5) J11.26(G6) J11.27(G7) J11.28(G8) J11.29(G9) J11.30(G10) J11.31(G11) R98.2 R99.1
1: SW4.1
4: SW4.4
B13_IO0: CON2.34
B13_L1_N: CON1.24 RN1.4
B13_L1_P: CON1.22 RN1.3
B13_L2_N: CON1.28 RN2.2
B13_L2_P: CON1.26 RN2.1
B13_L3_N: CON1.33 RN4.2
B13_L3_P: CON1.31 RN4.1
B13_L4_N: CON1.18 RN1.2
B13_L4_P: CON1.16 RN1.1
B13_L5_N: CON1.23 RN3.2
B13_L5_P: CON1.21 RN3.1
B13_L6_N: CON1.34 RN2.4
B13_L6_P: CON1.32 RN2.3
B13_L7_N: CON1.27 RN3.4
B13_L7_P: CON1.25 RN3.3
B13_L8_N: CON2.37 J6.34
B13_L8_P: CON2.35 J6.33
B13_L9_N: CON2.33 J6.36
B13_L9_P: CON2.31 J6.35
B13_L10_N: CON2.27 J6.38
B13_L10_P: CON2.25 J6.37
B13_L11_N: CON2.23
B13_L11_P: CON2.21
B13_L12_N: CON2.17
B13_L12_P: CON2.15
B13_L13_N: CON2.13
B13_L13_P: CON2.11
B13_L14_N: CON2.8
B13_L14_P: CON2.6
B13_L15_N: CON2.7
B13_L15_P: CON2.5
B13_L16_N: CON2.3
B13_L16_P: CON2.1
B14_IO0: CON2.79
B14_IO25: CON2.80
B14_L3_N: CON2.62
B14_L3_P: CON2.64
B14_L5_N: CON2.51
B14_L6_N: CON2.32
B14_L7_N: CON2.36
B14_L7_P: CON2.38
B14_L11_N: CON2.41 J6.32
B14_L11_P: CON2.43 J6.31
B14_L14_N: CON2.45 RN4.4
B14_L14_P: CON2.47 RN4.3
B14_L16_N: CON2.4
B14_L16_P: CON2.2
B14_L19_N: CON2.72
B14_L19_P: CON2.74
B15_IO25: CON3.2
B15_L1_N_AD0N: CON3.25
B15_L1_P_AD0P: CON3.27
B15_L3_N_AD1N: CON3.35
B15_L3_P_AD1P: CON3.37
B15_L5_N_AD9N: CON3.33
B15_L5_P_AD9P: CON3.31
B15_L7_N_AD2N: CON3.32
B15_L7_P_AD2P: CON3.34
B15_L11_N: CON3.23
B15_L11_P: CON3.21
B15_L14_N: CON3.53
B16_IO25: CON3.4
B16_L1_N: CON1.61 RN5.1
B16_L1_P: CON1.63 RN5.2
B16_L2_N: CON4.44
B16_L3_N: CON4.48
B16_L3_P: CON4.46
B16_L4_N: CON1.65 RN5.3
B16_L4_P: CON1.67 RN5.4
B16_L5_N: CON4.43
B16_L6_N: CON1.71 RN6.1
B16_L6_P: CON1.73 RN6.2
B16_L7_N: CON4.47
B16_L7_P: CON4.45
B16_L8_N: CON1.77 RN6.4
B16_L8_P: CON1.75 RN6.3
B16_L9_N: CON4.53
B16_L9_P: CON4.51
B16_L10_N: CON4.54
B16_L10_P: CON4.52
B16_L11_N: CON4.57
B16_L11_P: CON4.55
B16_L12_N: CON4.58
B16_L12_P: CON4.56 Y1.3(OUT)
B16_L13_N: CON4.63
B16_L13_P: CON4.61
B16_L14_N: CON4.64
B16_L14_P: CON4.62
B16_L15_N: CON4.67
B16_L15_P: CON4.65
B16_L16_N: CON4.68
B16_L16_P: CON4.66
B16_L17_N: CON4.73
B16_L17_P: CON4.71
B16_L18_N: CON4.74
B16_L18_P: CON4.72
B16_L19_N: CON4.77
B16_L19_P: CON4.75
B16_L20_N: CON4.78
B16_L20_P: CON4.76
B34_L18_N: CON1.41
B34_L18_P: CON1.43
B34_L19_N: CON1.47
B34_L19_P: CON1.45
B34_L20_N: CON1.38
B34_L20_P: CON1.36
B34_L21_N: CON1.42
B34_L21_P: CON1.44
B34_L22_N: CON1.48
B34_L22_P: CON1.46
B34_L23_N: CON1.37
B34_L23_P: CON1.35
B34_L24_N: CON1.58
B34_L24_P: CON1.56
B34_L25: CON1.54
FPGA_TCK: CON3.77 D6.3 R75.1
FPGA_TDI: CON3.78 D9.3 R78.1
FPGA_TDO: CON3.79 D7.3 R76.1
FPGA_TMS: CON3.80 D8.3 R77.1
HDMI_CEC_A: J5.13 U7.40(CEC_A)
HDMI_CEC_A_FPGA: D14.2(CATHODE) J10.13
HDMI_CLKN: J5.12 U7.54(TXC-) U11.1(LINE1) U11.10(NC4)
HDMI_CLKN_FPGA: CON3.24 J10.12 U13.1(LINE1) U13.10(NC4)
HDMI_CLKP: J5.10 U7.55(TXC+) U11.2(LINE2) U11.9(NC3)
HDMI_CLKP_FPGA: CON3.22 J10.10 U13.2(LINE2) U13.9(NC3)
HDMI_D0N: J5.9 U7.57(TX0-) U11.4(LINE3) U11.7(NC2)
HDMI_D0N_FPGA: CON3.18 J10.9 U13.4(LINE3) U13.7(NC2)
HDMI_D0P: J5.7 U7.58(TX0+) U11.5(LINE4) U11.6(NC1)
HDMI_D0P_FPGA: CON3.16 J10.7 U13.5(LINE4) U13.6(NC1)
HDMI_D1N: J5.6 U7.59(TX1-) U12.1(LINE1) U12.10(NC4)
HDMI_D1N_FPGA: CON3.14 J10.6 U14.1(LINE1) U14.10(NC4)
HDMI_D1P: J5.4 U7.60(TX1+) U12.2(LINE2) U12.9(NC3)
HDMI_D1P_FPGA: CON3.12 J10.4 U14.2(LINE2) U14.9(NC3)
HDMI_D2N: J5.3 U7.62(TX2-) U12.4(LINE3) U12.7(NC2)
HDMI_D2N_FPGA: CON3.8 J10.3 U14.4(LINE3) U14.7(NC2)
HDMI_D2P: J5.1 U7.63(TX2+) U12.5(LINE4) U12.6(NC1)
HDMI_D2P_FPGA: CON3.6 J10.1 U14.5(LINE4) U14.6(NC1)
HDMI_HOT_PLUG: J5.19 R24.2 U7.76(HPD)
HDMI_SCL: R29.2 U6.4(S2) U7.42(DSCL)
HDMI_SCL_FPGA: CON3.3 R94.2 U15.4(S2)
HDMI_SCL_H: J5.15 R32.2 U6.5(D1)
HDMI_SCL_H_FPGA: J10.15 R97.2 U15.5(D1)
HDMI_SDA: R28.2 U6.3(S1) U7.41(DSDA)
HDMI_SDA_FPGA: CON3.1 R93.2 U15.3(S1)
HDMI_SDA_H: J5.16 R31.2 U6.6(D2)
HDMI_SDA_H_FPGA: J10.16 R96.2 U15.6(D2)
IO_6N: J6.28 RN6.5
IO_6P: J6.27 RN6.6
IO_7N: J6.26 RN6.8
IO_7P: J6.25 RN6.7
IO_8N: J6.24 RN5.6
IO_8P: J6.23 RN5.5
IO_9N: J6.22 RN5.8
IO_9P: J6.21 RN5.7
IO_10N: J6.20 RN4.5
IO_10P: J6.19 RN4.6
IO_11N: J6.18 RN4.7
IO_11P: J6.17 RN4.8
IO_12N: J6.16 RN3.5
IO_12P: J6.15 RN3.6
IO_13N: J6.14 RN3.7
IO_13P: J6.13 RN3.8
IO_14N: J6.12 RN2.5
IO_14P: J6.11 RN2.6
IO_15N: J6.10 RN2.7
IO_15P: J6.9 RN2.8
IO_16N: J6.8 RN1.5
IO_16P: J6.7 RN1.6
IO_17N: J6.6 RN1.7
IO_17P: J6.5 RN1.8
KEY1: CON3.15 R83.1
KEY2: CON3.17 R85.1
LED0: CON3.13 D10.2(CATHODE)
LED1: CON3.11 D11.2(CATHODE)
LED2: CON3.7 D12.2(CATHODE)
LED3: CON3.5 D13.2(CATHODE)
LP_RX0_CK0N: CON2.16 R52.2
LP_RX0_CK0P: CON2.18 R50.2
LP_RX0_D0N: CON2.24 R55.2
LP_RX0_D0P: CON2.22 R53.2
LP_RX0_D1N: CON2.54 R59.2
LP_RX0_D1P: CON2.52 R57.2
LP_RX0_D2N: CON2.58 R62.2
LP_RX0_D2P: CON2.56 R60.2
LP_RX0_D3N: CON2.68 R65.2
LP_RX0_D3P: CON2.66 R63.2
MGT_RX0_N: C13.2 CON4.32
MGT_RX0_P: C12.2 CON4.30
MGT_RX1_N: C27.2 CON4.37
MGT_RX1_P: C26.2 CON4.35
MGT_RX2_N: CON4.20
MGT_RX2_P: CON4.18
MGT_TX0_N: C21.2 CON4.26
MGT_TX0_P: C20.2 CON4.24
MGT_TX1_N: C35.2 CON4.31
MGT_TX1_P: C34.2 CON4.29
MGT_TX2_N: CON4.14
MGT_TX2_P: CON4.12
MIPI_RX0_CK0N: CN5.6 CON2.14 R51.1 R52.1
MIPI_RX0_CK0P: CN5.5 CON2.12 R50.1 R51.2
MIPI_RX0_D0N: CN5.9 CON2.28 R54.2 R55.1
MIPI_RX0_D0P: CN5.8 CON2.26 R53.1 R54.1
MIPI_RX0_D1N: CN5.12 CON2.44 R58.2 R59.1
MIPI_RX0_D1P: CN5.11 CON2.42 R57.1 R58.1
MIPI_RX0_D2N: CN5.15 CON2.48 R61.2 R62.1
MIPI_RX0_D2P: CN5.14 CON2.46 R60.1 R61.1
MIPI_RX0_D3N: CN5.18 CON2.78 R64.2 R65.1
MIPI_RX0_D3P: CN5.17 CON2.76 R63.1 R64.1
RSTN: C66.1 CN5.29 CON2.67 R56.1
SADC_CH3/GPIO1_0: CN5.32 CON2.61
SADC_CH3/GPIO1_1: CN5.33 CON2.57
SADC_CH3/GPIO1_2: CN5.34 CON2.55
SADC_CH3/GPIO1_3: CN5.35 CON2.53
SDI0_SD/HD_OUT: CON4.42 U2.10(SD/H\D\)
SDI1_SD/HD_OUT: CON4.41 U4.10(SD/H\D\)
SENSOR_CLK0/BOOT_SEL0: CN5.25 CON2.73
SFP_LOSS: J11.8(RX_LOSS) R101.1
SFP_RX_N: C103.1 J11.12(-RX)
SFP_RX_P: C102.1 J11.13(+RX)
SFP_TX_DIS: J11.3(TX_DISABLE) R100.1 R102.2
SFP_TX_N: C101.1 J11.19(-TX)
SFP_TX_P: C100.1 J11.18(+TX)
SII9136_B0: CON3.55 U7.15(D4)
SII9136_B1: CON3.57 U7.14(D5)
SII9136_B2: CON3.61 U7.13(D6)
SII9136_B3: CON3.63 U7.11(D7)
SII9136_B4: CON3.65 U7.10(D8)
SII9136_B5: CON3.67 U7.9(D9)
SII9136_B6: CON3.71 U7.8(D10)
SII9136_B7: CON3.73 U7.7(D11)
SII9136_CLK: CON3.47 U7.22(IDCK)
SII9136_DE: CON3.41 U7.25(DE)
SII9136_G0: CON3.74 U7.99(D16)
SII9136_G1: CON3.72 U7.98(D17)
SII9136_G2: CON3.68 U7.97(D18)
SII9136_G3: CON3.66 U7.96(D19)
SII9136_G4: CON3.64 U7.95(D20)
SII9136_G5: CON3.62 U7.94(D21)
SII9136_G6: CON3.58 U7.93(D22)
SII9136_G7: CON3.56 U7.92(D23)
SII9136_HSYNC: CON3.43 U7.24(HSYNC)
SII9136_R0: CON3.54 U7.85(D28)
SII9136_R1: CON3.52 U7.84(D29)
SII9136_R2: CON3.48 U7.83(D30)
SII9136_R3: CON3.46 U7.82(D31)
SII9136_R4: CON3.44 U7.81(D32)
SII9136_R5: CON3.42 U7.80(D33)
SII9136_R6: CON3.38 U7.79(D34)
SII9136_R7: CON3.36 U7.78(D35)
SII9136_RESET: C44.1 CON3.51 R47.1 U7.47(RESET#)
SII9136_SCL: CON3.26 R49.2 U7.45(CSCL)
SII9136_SDA: CON3.28 R48.2 U7.44(CSDA)
SII9136_SYNC: CON3.45 U7.23(SYNC)
SII_+1.2V: C46.1 C47.1 C48.1 C49.1 C50.1 C51.1 L6.2 U7.5(CVCC12#5) U7.16(CVCC12#16) U7.21(CVCC12#21) U7.38(CVCC12#38) U7.88(CVCC12#88)
SPI0_CSN/I2C2_SDA: CN5.20 CON2.77
SPI0_SCLK/I2C1_SCL: CN5.31 CON2.63
SPI0_SDI/I2C2_SCL: CN5.21 CON2.75
SPI0_SDO/I2C1_SDA: CN5.30 CON2.65
SVB_PWM1/GPIO4_1: CN5.27 CON2.71
XADC_VN: CON1.51
XADC_VP: CON1.53
N45273: C15.1 L1.2 R1.2 R2.1
N45315: C16.1 R3.1
N45394: C15.2 U1.2(SDI)
N45398: C16.2 U1.3(S\D\I\)
N45410: C9.2 U1.6(A\G\C\)
N45414: C9.1 U1.5(AGC)
N45418: D1.1 J1.1 L1.1 R1.1
N47105: U1.14(MUTE) U1.15(C\D\)
N47109: C14.1 U1.8(MCLADJ)
N71446: C19.1 D2.1 J2.1
N71917: C19.2 L2.1 R10.1
N71926: L2.2 R4.2 R10.2 U2.12(SDO)
N72895: C18.2 R5.2 U2.11(S\D\O\)
N72928: C18.1 R8.1
N73295: R7.2 U2.4(RSET)
N73302: R6.2 U2.6(D\I\S\A\B\L\E\)
N81342: C29.1 L3.2 R11.2 R12.1
N81378: C30.1 R13.1
N81386: C29.2 U3.2(SDI)
N81390: C30.2 U3.3(S\D\I\)
N81402: C23.2 U3.6(A\G\C\)
N81406: C23.1 U3.5(AGC)
N81410: D3.1 J3.1 L3.1 R11.1
N81474: C33.1 D4.1 J4.1
N81498: C33.2 L4.1 R19.1
N81522: L4.2 R14.2 R19.2 U4.12(SDO)
N81550: C32.2 R15.2 U4.11(S\D\O\)
N81554: C32.1 R18.1
N81586: U3.14(MUTE) U3.15(C\D\)
N81590: C28.1 U3.8(MCLADJ)
N81694: R17.2 U4.4(RSET)
N81714: R16.2 U4.6(D\I\S\A\B\L\E\)
N87003: R26.2 R27.1 U5.5(ADJ)
N87086: C39.1 U5.4(BP)
N88970: C43.1 R30.2 U6.7(DREF) U6.8(GREF)
N94677: R33.1 U7.2(D15)
N94683: R34.1 U7.3(D14)
N94689: R35.1 U7.4(D13)
N94703: R36.1 U7.6(D12)
N94773: R37.1 U7.17(D3)
N94779: R38.1 U7.18(D2)
N94785: R39.1 U7.19(D1)
N94791: R40.1 U7.20(D0)
N95071: R45.1 U7.52(EXT_SWING)
N95677: R42.2 U7.90(D24)
N95681: R41.2 U7.89(D25)
N95689: R43.2 U7.87(D26)
N95693: R44.2 U7.86(D27)
N96566: R46.1 U7.43(CI2CA)
N123905: R66.2 U8.7(EN)
N123962: C70.2 R67.2
N123969: C70.1 U8.6(COMP)
N123973: C69.1 U8.8(SS)
N124063: C68.1 U8.1(BS)
N124070: C68.2 L8.1 U8.3(SW)
N124074: R68.1 R69.1 U8.5(FB)
N127719: R70.2 U9.7(EN)
N127767: C80.2 R71.2
N127775: C80.1 U9.6(COMP)
N127779: C79.1 U9.8(SS)
N127811: C78.1 U9.1(BS)
N127819: C78.2 L9.1 U9.3(SW)
N127823: R72.1 R73.1 U9.5(FB)
N137901: SW4.2 SW4.5 U10.3(VCC)
N142506: D10.1(ANODE) R79.2
N142645: D11.1(ANODE) R80.2
N142776: D12.1(ANODE) R81.2
N142907: D13.1(ANODE) R82.2
N146852: R83.2 R84.2 SW2.1(P1)
N146860: R85.2 R86.2 SW3.1(P1)
N150395: F1.2 SW4.3 SW4.6
N209486: C1.1 C2.2 C3.2
N209495: C1.2 G1.6(VDD) L10.1 R89.2
N209576: C5.1 G1.4(CLKP)
N209580: C4.1 G1.5(CLKN)
N209590: C5.2 CON4.36 R90.2
N209786: G1.1(OE) R89.1
N210571: C4.2 CON4.38 R90.1
N247477: C92.1 R95.2 U15.7(DREF) U15.8(GREF)
N329319: J10.19 R91.1
N434878: J11.7(RATE_S) R103.2
N435185: C94.1 C95.1 J11.16(VCCT) L12.2
N435191: C96.1 C97.1 J11.15(VCCR) L13.2
N473819: C100.2 CON4.17
N473945: C101.2 CON4.19
N473955: C102.2 CON4.23
N473965: C103.2 CON4.25
N480815: C21.1 R88.2 U2.1(S\D\I\)
N480817: C20.1 R88.1 U2.2(SDI)
N480866: C35.1 R87.2 U4.1(S\D\I\)
N480880: C34.1 R87.1 U4.2(SDI)
N0538213: C13.1 U1.11(S\D\O\)
N0538214: C12.1 U1.10(SDO)
N808860: C26.1 U3.10(SDO)
N809020: C27.1 U3.11(S\D\O\)
N1388970: D5.1(ANODE) R74.2
N1405481: J7.1 R75.2
N1405741: J7.3 R76.2
N1406001: J7.5 R77.2
N1406261: J7.9 R78.2

Pads without a net: CON1 11 12 13 14 15 17 52 55 57 62 64 66 68 72 74 76 78 79 80 81 84; CON2 81 84; CON3 75 76 81 84; CON4 1 2 3 4 5 6 7 8 11 13 79 80; G1 2; J5 14; J7 7 8; J10 14; J11 2 4 5 6; U2 7; U4 7; U7 26 27 28 29 30 31 32 33 34 35 36 39 46 49 50 51 64 65 66 67 68 69 70 71 72 73 74 75 77

## Via types
v1: diameter 0.457, hole 0.203, TOP to BOTTOM, 785 vias
v2: diameter 0.406, hole 0.203, TOP to BOTTOM, 1 via

## Routing (per net, layer and track width the routed paths; a pad name or vN(x,y) marks a point on that pad's centre or on a via; arc(x,y) is an arc through that point)
5V_HDMI: length 10.2
  TOP w0.152: R24.1 11.45,13.43 16.55,13.43 17.47,12.51 J5.18
  TOP w0.762: R25.1 R24.1
5V_HDMI_FPGA: length 5.5
  TOP w0.254: J10.18 48.52,14.34 47.76,15.1 46.99,15.1 R92.1
+1.2V: length 19.7
  TOP w0.381: R26.1 13.49,39.62 14.2,38.91 14.2,37.74 C52.1 14.24,35.97 L7.1 ; 10.77,38.67 7.36,38.67 7.36,38.67
  TOP w0.508: U5.6 10.62,40.59 10.75,40.46 R26.1
  TOP w0.635: L6.1 10.78,37.66 C45.1 10.77,39.6 R26.1 ; 7.36,38.67 6.39,37.7 C40.1 C41.1
+1.2V_A: length 7.6
  TOP w0.254: U7.61 v1(24.22,23.04) ; U7.56 v1(21.72,23.08)
  TOP w0.381: v1(13.32,32.95) 13.32,33.03 C53.1 12.63,33.73 L7.2
  BOTTOM w0.254: 23.99,24.04 24.22,23.82 v1(24.22,23.04) ; v1(21.72,23.08) 21.72,23.76 22.02,24.06
+3.3V: length 112.1
  TOP w0.152: 84.87,55.45 84.84,55.48 Y1.1 ; 84.87,55.45 C93.2 ; 84.87,55.45 84.92,55.4 ; Y1.1 v1(82.72,56.39) ; Y1.1 Y1.4
  TOP w0.254: U7.1 31.22,36.46 31.07,36.32 30.7,36.32 30.59,36.21 v1(30.54,36.21) ; v1(25.93,35.34) 25.72,35.55 U7.12 ; R86.1 v1(85.43,5.97) ; U7.91 v1(31.82,31.18) ; v1(18.67,30.33) 18.65,30.33 18.5,30.18 U7.37 ; D14.1 51.08,15.39 49.08,17.39 41.18,17.39 v1(40.71,16.93) 40.71,12.9 40.39,12.58 38.83,12.58 38.12,11.87 U15.2 ; R84.1 v1(72.16,5.97)
  TOP w0.356: R28.1 6.93,30.8 6.92,30.79 R29.1
  TOP w0.381: R28.1 8.34,30.23 v1(8.34,29.88) ; C56.1 6.47,45.9 ; 6.45,43.94 C57.1 ; v1(10.54,30.86) 9.75,30.86 C42.1
  TOP w0.457: 6.45,43.94 7.88,43.94 8.02,43.8 U5.3 v1(8.72,42.74) ; v1(10.62,42.76) U5.1 10.62,46.36 C37.1 10.58,48.33 C38.1
  TOP w0.508: 6.47,45.9 6.47,44.8 6.45,44.78 6.45,43.94 ; C91.1 39.17,17.04 v1(39.26,17.13) ; R48.1 v1(11.59,29.02) ; R93.1 v1(37.24,17.16) ; R49.1 v1(11.64,26.98) ; v1(9.29,24.75) 8.65,25.38 U6.2 ; R94.1 35.29,17.03 v1(35.39,17.13)
  TOP w0.635: R81.1 v1(76.96,14.47) ; R81.1 R82.1 v1(77.22,12.28) ; R81.1 75.36,16.65 R80.1 75.31,18.85 R79.1 ; L9.2 38.43,101.68 R73.2 ; J6.1 54.94,126.8 C90.1
  BOTTOM w0.254: C59.1 26.96,35.34 v1(25.93,35.34) 25.98,35.29 ; C61.1 18.73,30.98 18.7,30.95 18.7,30.36 v1(18.67,30.33) 18.71,30.33 18.74,30.35 18.74,30.39 18.68,30.45 ; D6.2 v1(32.88,119.9) ; C60.1 30.54,35.65 v1(30.54,36.21) ; R100.2 R103.1 83.93,105.78 R101.2 76.04,105.8 74.71,104.47 L13.1 ; D8.2 v1(41.14,119.97) ; C58.1 30.94,31.18 v1(31.82,31.18) ; D9.2 v1(45.71,119.94) ; D7.2 v1(36.69,119.99)
  BOTTOM w0.381: C99.1 73.29,98.94 C98.1 ; L12.1 74.68,100.09 73.69,101.07 73.69,102.31 L13.1
  vias: v1(12.53,54.19) v1(12.53,53.39) v1(13.33,54.19) v1(13.33,53.39) v1(14.13,54.19) v1(14.13,53.39) v1(14.93,54.19) v1(14.93,53.39) v1(26.7,99.05) v1(26.7,98.25) v1(26.7,97.45) v1(26.7,96.65) v1(26.7,95.85) v1(26.7,95.05) v1(26.7,94.25) v1(27.5,99.05) v1(27.5,98.25) v1(27.5,97.45) v1(27.5,96.65) v1(27.5,95.85) v1(27.5,95.05) v1(27.5,94.25) v1(28.3,97.45) v1(28.3,96.65) v1(28.3,95.85) v1(28.3,95.05) v1(28.3,94.25) v1(73.04,100.3) v1(73.05,99.71) v1(73.75,100.24) v1(73.74,99.71) v1(74.25,89.09) v1(74.25,88.29) v1(74.25,87.49) v1(75.05,89.09) v1(75.05,88.29) v1(75.05,87.49) v1(75.05,86.69) v1(75.85,89.09) v1(75.85,85.89) v1(76.65,89.09) v1(76.65,85.89)
+3.3V SDI: length 35.1
  TOP w0.152: v1(84.28,50.57) C2.1 85.68,50.6 C3.1 87.59,50.55 89.26,52.22 L10.2
  TOP w0.381: 91.51,19.31 v1(91.51,18.57) ; 91.51,19.31 R16.1 ; 91.51,19.31 91.53,19.28 91.91,19.28 92.67,20.04 U4.9 ; v1(93.76,18.7) 93.86,18.7 94.08,18.93 94.08,19.27 C36.1 ; R14.1 93.97,25.75 C31.1 v1(93.81,26.65) ; R4.1 93.3,86.87 C17.1 93.2,87.83 v1(92.91,88.12) ; U1.13 89.34,66.07 89.33,66.06 C10.1 v1(89.33,64.73) ; v1(91.35,64.84) C11.1 91.35,66.11 91.29,66.17 U1.16 ; R5.1 93.38,81.36 93.89,80.85 C22.1 93.89,79.38 93.52,79 v1(92.99,79) ; R17.1 86.6,20.14 v2(87.73,19.01) ; v1(90.94,37.21) C24.1 90.94,38.41 90.9,38.45 U3.16 ; R7.1 v1(84.46,81.98) ; U2.9 92,81.5 90.91,80.42 R6.1 v1(90.81,79.59) ; v1(88.94,37.19) C25.1 88.94,38.39 88.95,38.4 U3.13
  TOP w0.432: C36.1 94.09,19.49 R15.1
  vias: v1(78.14,89.09) v1(78.14,85.89) v1(78.94,89.09) v1(78.94,85.89) v1(79.74,89.09) v1(79.74,88.29) v1(79.74,87.49) v1(79.74,86.69) v1(79.74,85.89) v1(80.54,89.09) v1(80.54,88.29) v1(80.54,87.49) v1(80.54,86.69)
+5.0V: length 30.2
  TOP w0.356: CN5.23 v1(12.24,65.57) ; CN5.22 v1(12.26,65.07)
  TOP w0.381: R92.2 44.84,15.34 43.69,15.34 43.37,15.03 v1(43.37,12.7)
  TOP w0.508: R31.1 v1(7.14,15.48) ; R96.1 v1(36.61,2.36) ; R30.1 v1(11.06,15.45) ; R25.2 v1(8.18,11.41) ; v1(33.15,2.28) 33.92,1.51 R97.1 ; R95.1 v1(40.53,2.37) ; R32.1 v1(5.2,15.46)
  TOP w0.635: C89.1 103.32,122.24 J6.39 ; R69.2 16.36,101.83 L8.2
  vias: v1(5.14,99.08) v1(5.14,98.28) v1(5.14,97.48) v1(5.14,96.67) v1(5.14,95.87) v1(5.14,95.07) v1(5.14,94.27) v1(5.94,99.08) v1(5.94,98.28) v1(5.94,97.48) v1(5.94,96.67) v1(5.94,95.87) v1(5.94,95.07) v1(5.94,94.27) v1(6.74,97.48) v1(6.74,96.67) v1(6.74,95.87) v1(6.74,95.07) v1(6.74,94.27) v1(16.65,65.65) v1(16.65,64.85) v1(46.77,89.31) v1(46.77,87.71) v1(47.57,89.31) v1(47.57,88.51) v1(47.57,87.71) v1(48.37,89.31) v1(48.37,88.51) v1(48.37,87.71)
+12V: length 15
  TOP w0.635: 32.49,112.32 32.52,112.28 R70.1 32.52,110.05 34.17,108.4 34.17,107.51 33.25,106.58 U9.2 ; 10.7,112.41 10.74,112.37 R66.1 10.74,110.14 12.39,108.5 12.39,107.6 11.46,106.67 U8.2
AGND: length 26.1
  TOP w0.152: J10.20 45.27,12.33 arc(45.16,12.89) R91.2
  TOP w0.254: J10.5 v1(55.02,8.76) ; J10.17 v1(49.02,8.76) ; J5.11 v1(20.97,8.56) ; J10.2 v1(56.52,8.76) ; J5.17 v1(17.97,8.56) ; J5.5 v1(23.97,8.56) ; J5.2 v1(25.47,8.56) ; J5.8 v1(22.47,8.56) ; J10.11 v1(52.02,8.76) ; J10.8 v1(53.52,8.76)
  vias: v1(9.45,9.67) v1(9.45,4.87) v1(9.45,4.07) v1(10.25,9.67) v1(10.25,4.87) v1(10.25,4.07) v1(11.05,9.67) v1(11.05,8.87) v1(11.05,8.07) v1(11.05,7.27) v1(11.05,6.47) v1(11.05,5.67) v1(11.05,4.87) v1(11.05,4.07) v1(11.85,9.67) v1(11.85,8.87) v1(11.85,8.07) v1(11.85,7.27) v1(11.85,6.47) v1(11.85,5.67) v1(11.85,4.87) v1(11.85,4.07) v1(12.65,9.67) v1(12.65,8.87) v1(12.65,8.07) v1(12.65,7.27) v1(12.65,6.47) v1(12.65,5.67) v1(12.65,4.87) v1(12.65,4.07)
GND: length 378.4
  TOP w0.152: CON4.28 v1(78.65,66.97) ; CON1.60 v1(61.35,91.82) ; CON4.39 72.64,63.97 v1(72.34,64.27) ; CON1.20 v1(51.35,89.19) ; CON2.19 v1(38.64,58.47) ; CON2.49 v1(38.64,65.97) ; CON4.21 74.36,68.47 v1(74.8,68.03) ; CON3.40 v1(56.85,40.15) ; CON2.40 v1(37.22,63.47) ; CON1.69 v1(63.85,85.14) ; CON4.15 72.8,69.97 v1(72.03,70.73) ; CON3.60 v1(51.85,40.15) ; v1(49.44,88.95) 48.85,89.54 CON1.10 ; CON3.19 v1(61.85,41.57) ; CON4.34 79.1,65.47 v1(79.16,65.41) ; v1(53.32,89.29) 53.85,89.82 CON1.30 ; CON1.49 v1(58.85,85.14) ; CON1.9 48.85,87.41 v1(49.32,87.87) ; CON1.19 v1(51.35,85.14) ; v1(63.72,40.29) 64.35,39.67 CON3.10 ; CON4.27 74.74,66.97 v1(74.79,67.02) ; CON3.59 v1(51.85,41.57) ; CON4.69 v1(71.98,56.47) ; CON3.69 49.35,41.95 48.96,41.55 v1(48.9,41.55) ; CON4.59 v1(72.18,58.97) ; CON1.70 63.85,91.49 v1(63.45,91.89) ; v1(76.27,64.66) 76.27,64.53 76.83,63.97 CON4.40 ; CON3.50 v1(54.35,40.15) ; CON1.50 v1(58.85,89.19) ; CON4.60 v1(78.86,58.97) ; v1(57.16,89.1) 57.07,89.1 56.35,89.82 CON1.40 ; CON4.10 78.7,71.47 v1(78.76,71.41) ; CON2.39 v1(38.64,63.47) ; CON3.30 v1(59.35,40.15) ; CON2.50 v1(37.22,65.97) ; CON2.30 v1(37.22,60.97) ; CON1.59 v1(61.35,85.14) ; CON1.39 v1(56.35,85.14) ; CON2.9 v1(38.64,55.97) ; C93.1 84.47,57.58 Y1.2 82.72,57.59 81.38,58.93 v1(80.94,58.93) ; CON2.69 v1(38.64,70.97) ; CON4.50 v1(78.86,61.47) ; CON4.9 v1(72.11,71.47) ; CON4.49 v1(72.18,61.47) ; CON3.20 v1(61.85,40.15) ; CON3.9 v1(64.35,41.57) ; CON4.33 v1(74.6,65.47) ; CON3.29 v1(59.35,41.57) ; CON4.16 v1(78.77,69.97) ; CON3.70 49.35,40.58 v1(49.78,41.02) ; CON2.70 v1(37.22,70.97) ; CON2.29 v1(38.64,60.97) ; CON2.60 v1(37.22,68.47) ; CON1.29 v1(53.85,85.14) ; CON4.22 v1(78.65,68.47) ; CON3.49 v1(54.35,41.57) ; CON4.70 v1(78.86,56.47) ; CON2.20 v1(37.22,58.47) ; CON2.59 v1(38.64,68.47) ; CON3.39 v1(56.85,41.57) ; CON2.10 v1(37.22,55.97)
  TOP w0.203: U7.100 33.42,36.08 v1(33.42,36.15) ; CN5.24 v1(9.27,66.07) ; CN5.26 v1(9.27,67.07) ; CN5.28 v1(9.27,68.07)
  TOP w0.254: U12.3 v1(24.8,15.76) ; v1(40.12,14.71) 40.02,14.71 39.25,13.94 C91.2 39.17,13.89 ; SW2.2 v1(83.53,2.9) ; U15.1 39.93,11.71 v1(40.33,11.71) ; v1(12.39,57.54) 11.08,57.54 CN5.7 v1(9.27,57.57) ; U14.3 v1(58.53,17.65) ; v1(9.27,60.57) CN5.13 12.84,60.57 12.86,60.58 ; U7.48 v1(15.82,24.68) ; CN5.36 v1(9.27,72.07) ; v1(87.48,82.75) 87.49,82.75 88.14,83.4 U2.3 ; 12.8,62.1 12.77,62.07 CN5.16 v1(9.27,62.07) ; 13,59.08 12.99,59.07 CN5.10 v1(9.27,59.07) ; U11.8 v1(21.1,17.53) ; v1(88.87,45.36) 88.25,45.36 87.89,45.01 C28.2 ; v1(85.38,63.96) 89.77,63.96 G1.3 ; CN5.19 v1(9.27,63.57) ; U13.3 v1(54.87,17.72) ; CN5.4 v1(9.27,56.07) ; U14.8 v1(58.53,19.86) ; U4.3 88.87,22.32 v1(88.31,21.76) ; SW3.2 v1(96.6,3) ; U7.53 v1(20.22,20.6) ; 9.07,79.37 v1(9.07,80.39) ; CN5.3 v1(9.27,55.57) ; U11.3 v1(21.1,15.56) ; 11.13,79.83 v1(11.13,80.85) ; U13.8 v1(54.87,19.93) ; U12.8 v1(24.8,17.49)
  TOP w0.381: D2.2 v1(97.1,82.31) ; U2.8 91.13,81.47 v1(90.9,81.25) ; U1.1 v1(92.16,67.19) ; U2.16 v1(89.17,86.13) ; R18.2 v1(95.89,20.47) ; C22.2 92.87,79.89 v1(91.75,78.77) ; v1(92.54,38.7) 92.54,38.41 C24.2 ; U3.9 v1(88.08,42.49) ; U2.13 v1(91.13,86.13) ; C14.2 v1(88.29,71.47) ; D1.2 v1(98.27,64.87) ; U3.7 v1(89.6,43.36) ; U3.12 v1(87.52,39.98) ; R3.2 v1(95.67,71.37) ; U4.15 v1(90.5,25.05) ; v1(11.71,20.86) R45.2 ; U4.13 v1(91.8,25.05) ; D4.2 v1(98.21,20.41) ; v1(11.7,22.87) C44.2 ; v1(9.83,34.57) 9.83,34.32 C46.2 ; U3.1 v1(92.33,39.98) ; U3.4 v1(92.33,41.93) ; C66.2 11.13,79.83 ; U1.12 v1(88.46,67.19) ; v1(10.76,26.36) U6.1 ; R2.2 v1(96.11,69.92) ; R12.2 v1(95.74,42.16) ; R13.2 v1(94.74,44.01) ; U4.14 v1(91.15,25.05) ; R56.2 9.07,79.37 ; R8.2 v1(94.92,81.43) ; C31.2 v1(92.79,24.95) ; v1(9.7,28.24) C42.2 ; U2.5 v1(89.17,81.32) ; U4.8 v1(91.8,20.24) ; C10.2 v1(87.75,65.48) ; C36.2 v1(95.97,19.39) ; v1(9.08,15.39) C43.2 ; U1.7 v1(89.99,71.13) ; C17.2 v1(91.63,86.97) ; U1.4 v1(92.16,70.25) ; C25.2 v1(87.37,37.82) ; U1.9 v1(88.46,70.25) ; U4.16 v1(89.84,25.05) ; U2.15 v1(89.82,86.13) ; U4.5 v1(89.84,20.04) ; C11.2 92.36,66.19 v1(92.7,66.53) ; U2.14 v1(90.47,86.13) ; D3.2 v1(97.94,37.45)
  TOP w0.508: R67.1 v1(19.41,108.98) ; C38.2 v1(8.93,49.59) ; C86.2 v1(23.85,110.39) ; R72.2 v1(43.12,102.3) ; J11.20 v1(78.91,99.01) ; C57.2 v1(3.48,43.94) ; C41.2 v1(3.47,35.76) ; C67.2 v1(13.57,112.41) ; R47.2 v1(11.64,24.85) ; C79.2 v1(40.79,110.01) ; C56.2 v1(3.51,45.9) ; C81.2 v1(23.85,108.47) ; J11.14 82.4,103.81 v1(82.44,103.86) ; J11.17 82.26,101.41 v1(82.42,101.57) ; U5.2 v1(9.67,45.04) ; C53.2 v1(15.53,33.72) ; C69.2 v1(19.01,110.1) ; J11.9 v1(90.7,105.82) ; C92.2 38.68,1.49 v1(39.5,2.31) ; C45.2 v1(7.86,37.66) ; U9.4 v1(34.39,104.04) ; J11.10 v1(90.66,106.62) ; C40.2 v1(3.47,37.68) ; R27.2 v1(3.2,39.65) ; R68.2 v1(21.33,102.4) ; R46.2 v1(11.64,31.05) ; C83.2 v1(23.85,104.57) ; J11.11 79.31,106.22 v1(78.96,106.56) ; C39.2 v1(3.46,41.98) ; R71.1 v1(41.19,108.89) ; C84.2 v1(23.87,102.62) ; J11.1 v1(90.7,99.42) ; C77.2 v1(35.35,112.32) ; C52.2 v1(12.56,38.94) ; C37.2 v1(8.91,45.17) ; C85.2 v1(23.85,100.69) ; C82.2 v1(23.86,106.52)
  TOP w0.635: C89.2 105.12,127.96 103.62,129.46 J6.40 ; C71.2 v1(1.36,108.56) ; C90.2 56.61,124.45 57.22,125.06 57.22,126.54 J6.3 ; U8.4 v1(12.6,104.13) ; C75.2 v1(1.35,100.78) ; 3.23,102.71 v1(1.37,102.71) ; C76.2 v1(1.35,104.66) ; C72.2 v1(1.36,106.61) ; C73.2 v1(1.35,110.48)
  BOTTOM w0.152: v1(34.28,38.09) 39.27,33.1 R42.1 ; 39.55,11.71 39.5,11.66 v1(39.5,2.31) ; R44.1 37.16,24.56 31.15,24.56 v1(30.07,25.63) ; v1(36.12,38.82) 40.99,33.95 40.99,30.53 39.27,28.81 R43.1 ; R41.1 39.47,30.53 40.24,31.3 40.24,33.39 v1(35.12,38.51)
  BOTTOM w0.254: R39.2 v1(21.45,44.4) ; v1(28.99,32.5) C49.2 ; D8.1 v1(41.14,123.72) ; R38.2 23.43,43.49 v1(21.99,44.94) ; R33.2 33.84,43.3 31.79,45.35 28.09,45.35 v1(25.49,47.96) ; v1(28.13,31.25) C58.2 ; v1(29.12,28.29) 29.12,29.25 C48.2 ; v1(22.35,30.98) C61.2 ; v1(23.24,32.54) C50.2 ; v1(24.09,46.74) 26.87,43.95 28.73,43.95 R35.2 ; v1(22.34,29.03) C47.2 ; R102.1 v1(84.73,99.84) ; C97.2 76.53,104.02 C96.2 ; C55.2 23.95,25.81 v1(22.97,25.81) 22.03,25.81 C54.2 21.97,25.84 v1(21.01,25.84) ; R37.2 v1(22.7,45.51) ; v1(23.51,46.19) 26.9,42.8 R36.2 ; v1(21.31,32.54) C51.2 ; D6.1 v1(32.88,123.58) ; v1(24.72,47.43) 27.48,44.66 29.62,44.66 31.48,42.8 R34.2 ; v1(30.93,32.52) C60.2 ; D7.1 v1(36.69,123.75) ; D9.1 v1(45.71,123.6) ; R40.2 v1(19.47,43.78) ; v1(27.06,32.5) C59.2
  BOTTOM w0.381: C98.2 v1(73.38,96.81) ; C99.2 v1(71.97,96.13) ; C97.2 v1(76.26,105.11) ; C95.2 76.78,100.49 C94.2 v1(78.3,99.89) ; v1(12.61,68.06) 12.61,67.61 C65.1 15.65,66.81 C64.1
  vias: v1(4.56,10.53) v1(4.56,9.73) v1(4.56,8.93) v1(4.56,8.13) v1(4.56,7.33) v1(5.36,10.53) v1(5.36,9.73) v1(5.36,8.93) v1(5.36,8.13) v1(5.36,7.33) v1(6.16,10.53) v1(6.16,9.73) v1(6.16,8.93) v1(6.16,8.13) v1(6.16,7.33) v1(6.16,6.53) v1(6.96,10.53) v1(6.96,9.73) v1(7.76,10.53) v1(7.76,9.73) v1(7.76,4.93) v1(14.9,57.43) v1(17.12,57.51) v1(21.5,61.59) v1(21.5,60.7) v1(21.5,59.95) v1(21.6,72.59) v1(21.6,69.9) v1(21.58,69.02) v1(21.6,68.24) v1(21.56,65.94) v1(21.56,64.96) v1(21.54,63.85) v1(21.63,73.44) v1(21.63,57.28) v1(21.66,56.43) v1(21.72,55.7) v1(22.88,120.04) v1(23.88,120.04) v1(24.1,30.84) v1(24.1,30.04) v1(24.1,29.24) v1(24.1,28.44) v1(24.34,69.27) v1(24.39,68.64) v1(24.51,64.81) v1(24.48,61.32) v1(24.51,60.61) v1(24.51,60.05) v1(24.51,56.96) v1(24.53,57.68) v1(24.53,56.09) v1(24.64,74.06) v1(24.62,73.39) v1(24.88,120.04) v1(24.9,30.84) v1(24.9,30.04) v1(24.9,29.24) v1(24.9,28.44) v1(24.98,65.39) v1(25.7,30.84) v1(25.7,30.04) v1(25.7,29.24) v1(25.7,28.44) v1(25.88,120.04) v1(26.5,30.84) v1(26.5,30.04) v1(26.5,29.24) v1(26.5,28.44) v1(26.88,120.04) v1(26.88,119.04) v1(26.88,118.04) v1(26.88,117.04) v1(27.88,120.04) v1(27.88,119.04) v1(27.88,118.04) v1(27.88,117.04) v1(28.88,120.04) v1(28.88,119.04) v1(28.88,118.04) v1(28.88,117.04) v1(32.75,71.07) v1(33.13,68.72) v1(33.24,69.3) v1(33.47,58.42) v1(33.67,71.63) v1(34.28,63.24) v1(34.27,62.29) v1(34.27,61.3) v1(34.4,74.62) v1(34.37,73.91) v1(34.39,54.42) v1(34.44,55.66) v1(84.71,115.01) v1(84.71,114.21) v1(84.71,113.41) v1(84.71,112.61) v1(85.51,115.01) v1(85.51,114.21) v1(86.31,115.01) v1(86.31,114.21) v1(87.11,115.01) v1(87.11,114.21) v1(87.91,114.21) v1(87.91,113.41) v1(87.91,112.61) v1(88.62,93.59) v1(88.62,92.79) v1(88.62,91.99) v1(88.71,42.17) v1(88.71,41.37) v1(88.71,40.57) v1(88.71,39.77) v1(88.93,84.91) v1(88.93,84.11) v1(88.93,83.31) v1(88.93,82.51) v1(89.11,69.93) v1(89.11,69.13) v1(89.11,68.33) v1(89.11,67.53) v1(89.32,62.76) v1(89.32,61.96) v1(89.42,91.99) v1(89.42,91.19) v1(89.51,42.17) v1(89.51,41.37) v1(89.51,40.57) v1(89.51,39.77) v1(89.62,23.86) v1(89.62,23.06) v1(89.62,22.26) v1(89.62,21.46) v1(89.73,84.91) v1(89.73,84.11) v1(89.73,83.31) v1(89.73,82.51) v1(89.91,69.93) v1(89.91,69.13) v1(89.91,68.33) v1(89.91,67.53) v1(90.22,91.99) v1(90.22,91.19) v1(90.31,42.17) v1(90.31,41.37) v1(90.31,40.57) v1(90.31,39.77) v1(90.42,23.86) v1(90.42,23.06) v1(90.42,22.26) v1(90.42,21.46) v1(90.53,84.91) v1(90.53,84.11) v1(90.53,83.31) v1(90.71,69.93) v1(90.71,69.13) v1(90.71,68.33) v1(90.71,67.53) v1(91.02,91.99) v1(91.02,91.19) v1(91.11,42.17) v1(91.11,41.37) v1(91.11,40.57) v1(91.11,39.77) v1(91.25,116.46) v1(91.22,23.86) v1(91.22,23.06) v1(91.22,22.26) v1(91.22,21.46) v1(91.33,84.91) v1(91.33,84.11) v1(91.33,83.31) v1(91.33,82.51) v1(91.51,69.93) v1(91.51,69.13) v1(91.51,68.33) v1(91.51,67.53) v1(91.82,93.59) v1(91.82,92.79) v1(91.82,91.99) v1(91.82,91.19) v1(92.02,23.86) v1(92.02,23.06) v1(92.02,22.26) v1(92.02,21.46) v1(92.52,117.73) v1(92.52,116.46) v1(92.89,10.95) v1(92.89,9.68) v1(92.89,8.41) v1(93.79,119) v1(93.79,117.73) v1(93.79,116.46) v1(94.16,10.95) v1(94.16,9.68) v1(94.16,8.41) v1(95.06,119) v1(95.06,117.73) v1(95.06,116.46) v1(95.43,10.95) v1(95.43,9.68) v1(95.43,8.41) v1(96.33,119) v1(96.33,117.73) v1(96.33,116.46) v1(96.7,10.95) v1(96.7,9.68) v1(96.7,8.41) v1(97.6,119) v1(97.6,117.73) v1(97.6,116.46) v1(97.97,10.95) v1(97.97,9.68) v1(97.97,8.41) v1(98.87,119) v1(98.87,117.73) v1(98.87,116.46) v1(99.24,10.95) v1(99.24,9.68) v1(99.24,8.41) v1(100.14,119) v1(100.14,117.73) v1(100.14,116.46) v1(100.51,10.95) v1(100.51,9.68) v1(100.51,8.41) v1(101.41,119) v1(101.41,117.73) v1(101.41,116.46) v1(101.78,10.95) v1(101.78,9.68) v1(101.78,8.41) v1(102.68,119) v1(102.68,117.73) v1(102.68,116.46) v1(103.05,10.95) v1(103.05,9.68) v1(103.05,8.41) v1(103.95,119) v1(103.95,117.73) v1(103.95,116.46) v1(104.32,10.95) v1(104.32,9.68) v1(104.32,8.41) v1(105.22,119) v1(105.22,117.73) v1(105.22,116.46) v1(105.59,10.95) v1(105.59,9.68) v1(105.59,8.41) v1(106.49,119) v1(106.49,117.73) v1(106.49,116.46) v1(106.86,10.95) v1(106.86,9.68) v1(106.86,8.41) v1(107.76,119) v1(107.76,117.73) v1(107.76,116.46) v1(108.13,10.95) v1(108.13,9.68) v1(108.13,8.41) v1(109.03,119) v1(109.03,117.73) v1(109.03,116.46) v1(109.4,10.95) v1(109.4,9.68) v1(109.4,8.41)
